# EAGLE board Micro_SD_Block_GiantPanel_v20 (EAGLE 6.6.0), part 1 of 11
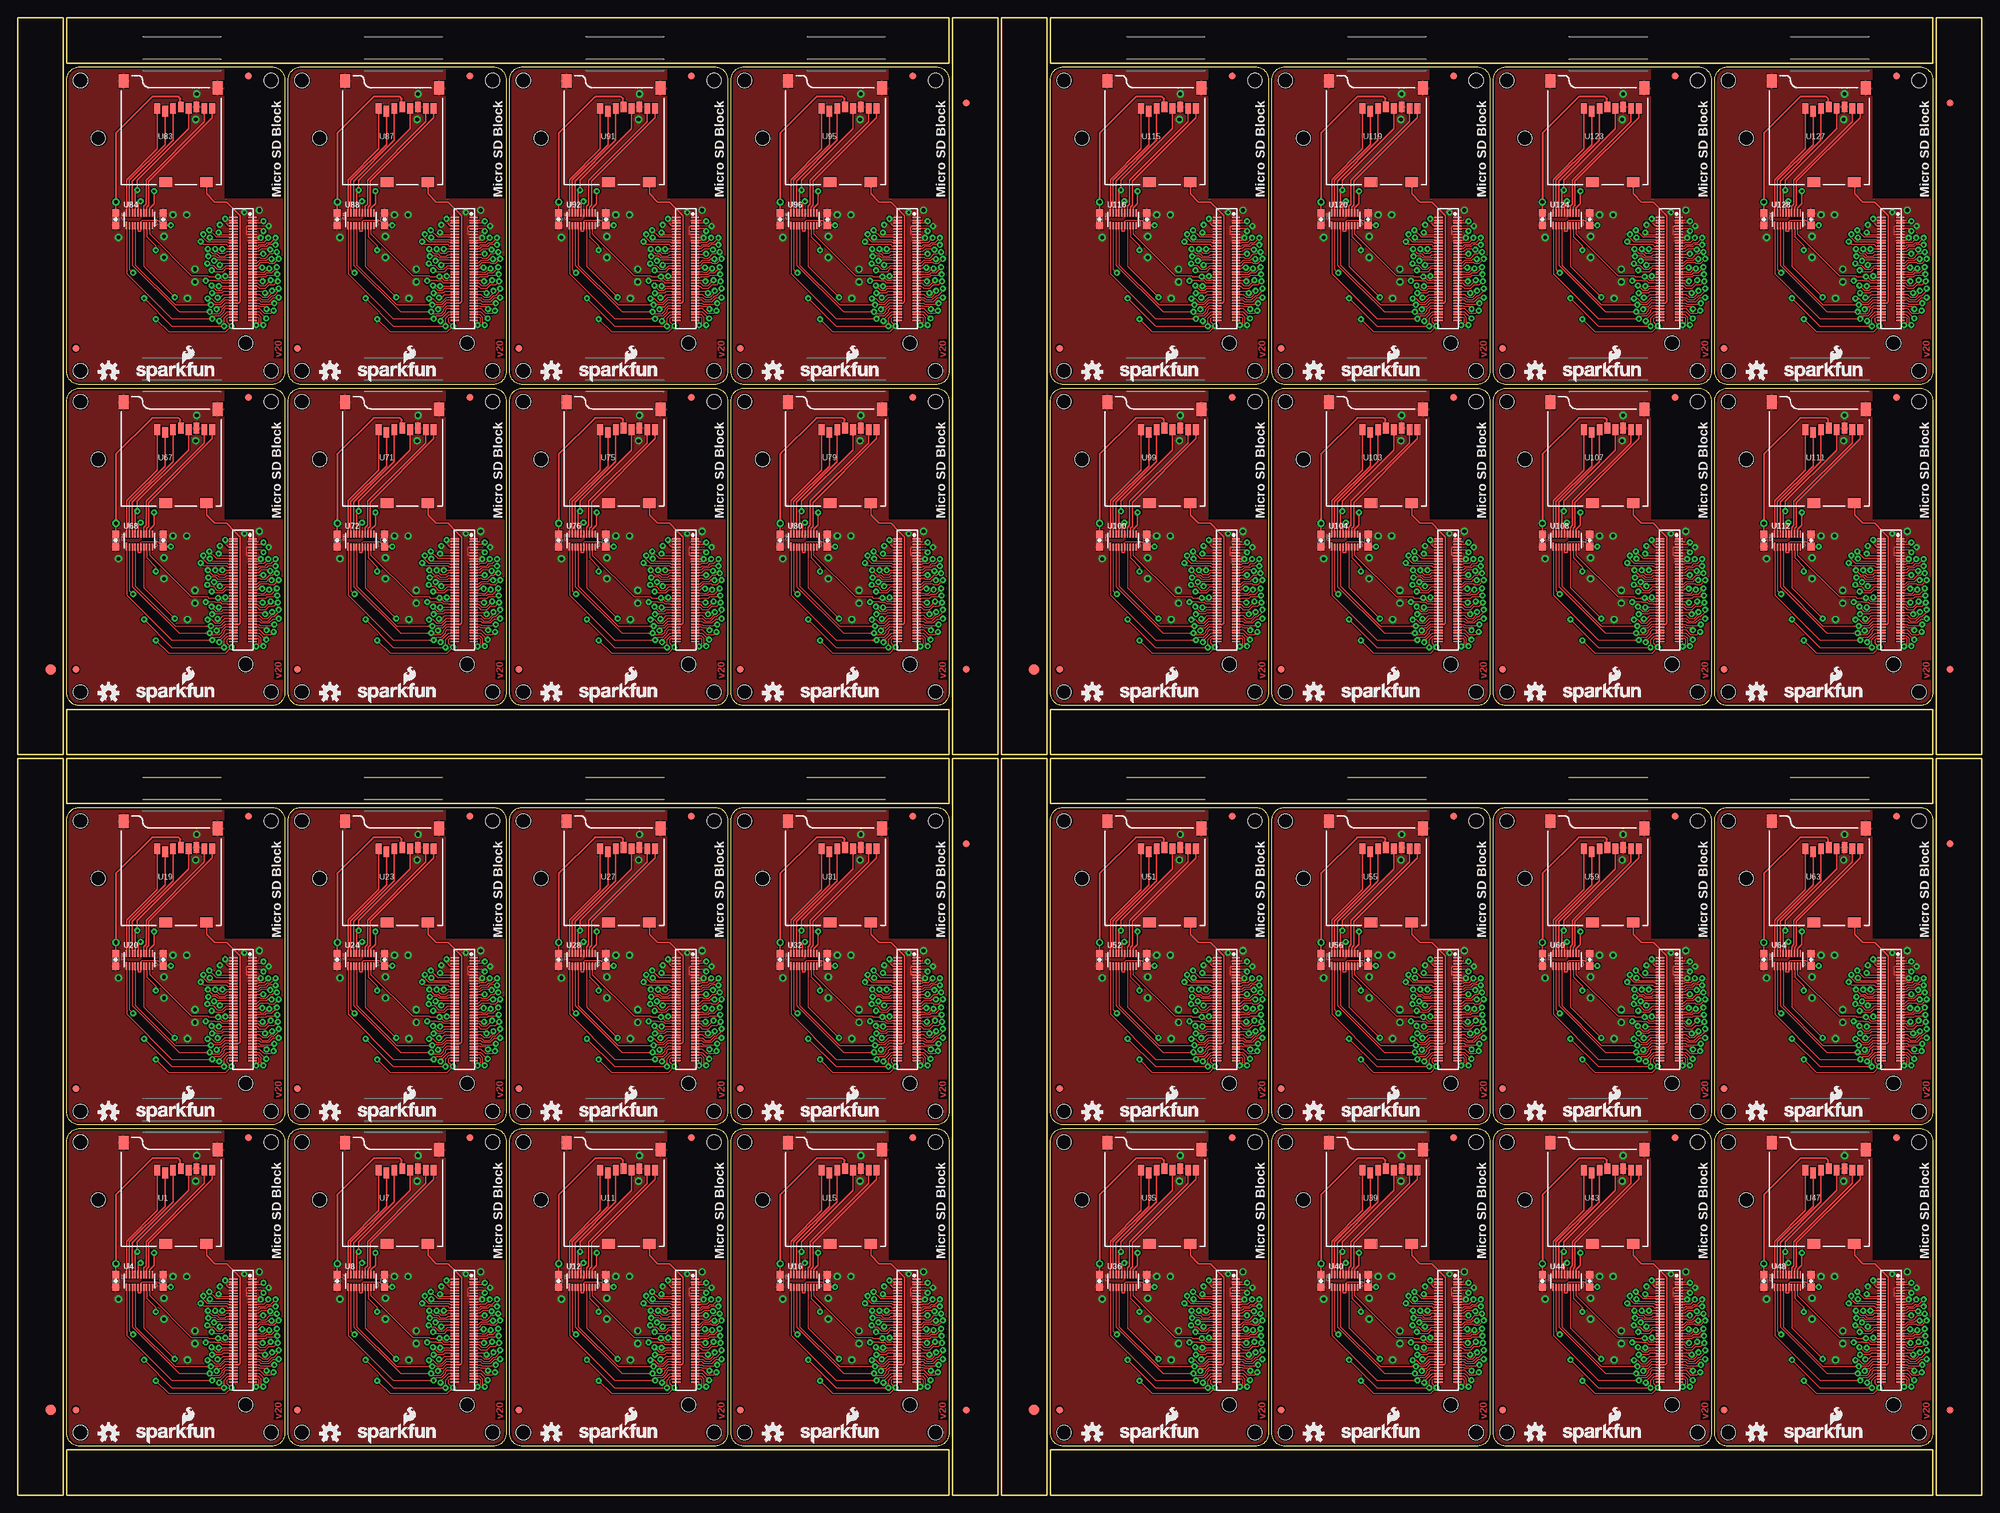
[diagram p0: board, top side]
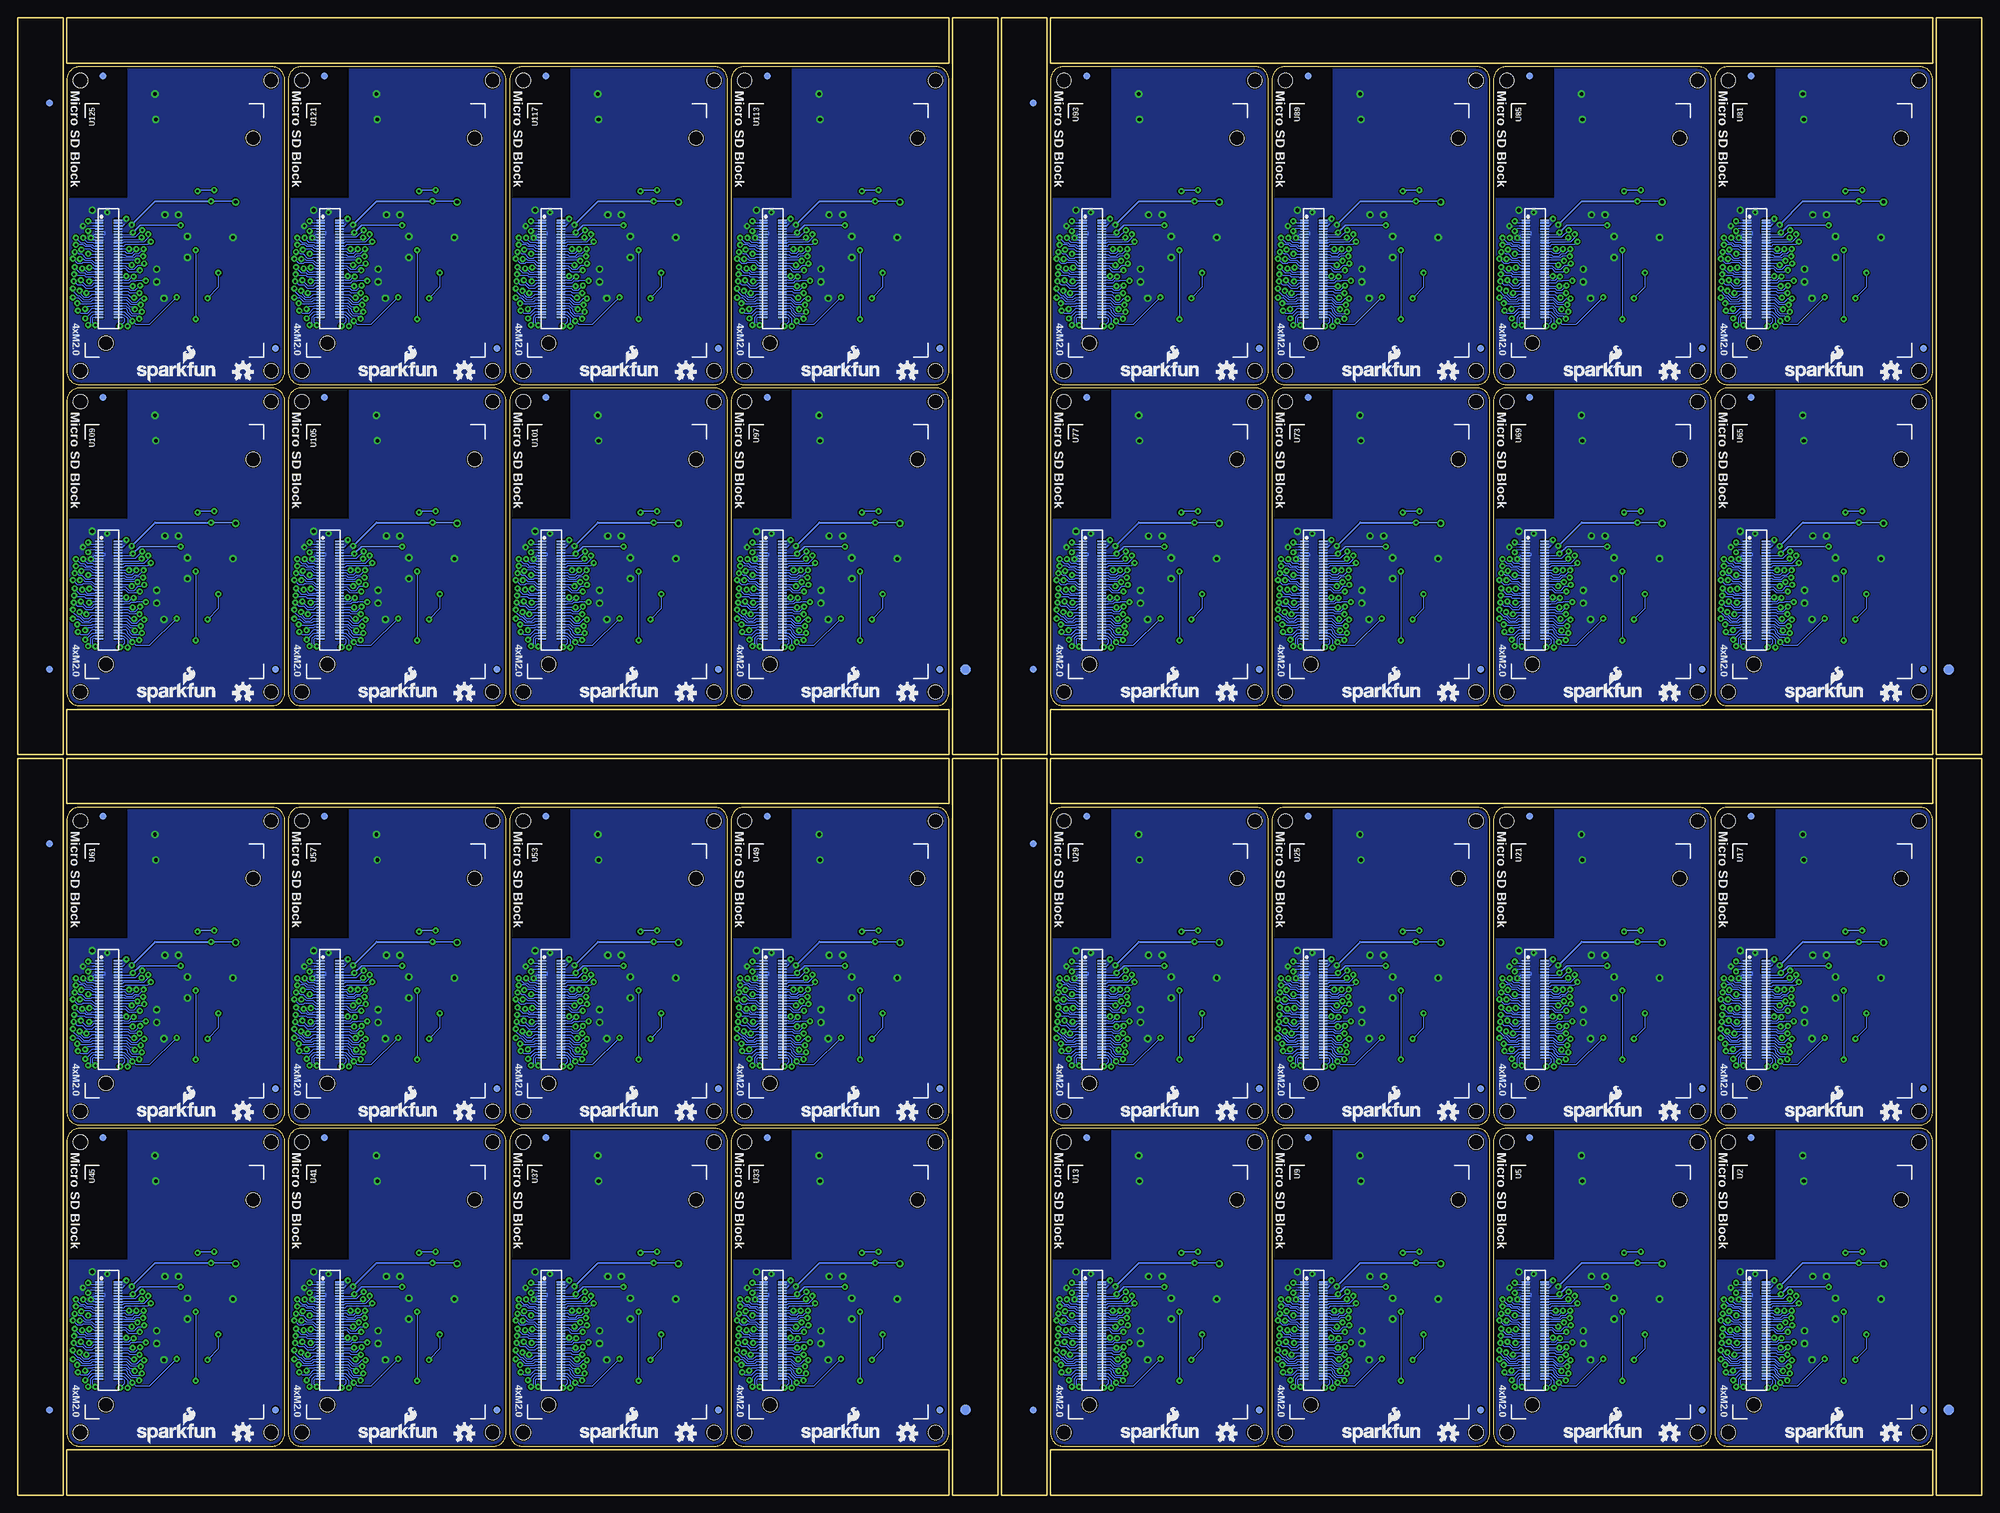
[diagram p1: board, bottom side, seen from below]

Size 274.83 x 206.76 mm. Coordinates in mm from the lower left corner, seen from the top.
Outline: 336 segments
Copper layers (1*16): Top 0.035mm / dielectric 1.5mm / Bottom 0.035mm
Design rules "SparkFun-2-layer *": minimum track width 6mil, minimum drill 13mil, track to track 6mil, track to pad 6mil, pad to pad 6mil, via to via 6mil, smd to smd 6mil, copper to edge 8mil, drill to drill 8mil, minimum pad ring 12mil, minimum via ring 10mil, stop-mask expansion 4mil, vias tented up to drill 20mil, thermal gap 6mil
Holes 2 mm at 35.43,8.76 8.76,8.76 8.76,49.4 35.43,49.4 66.42,8.76 39.75,8.76 39.75,49.4 66.42,49.4 97.41,8.76 70.74,8.76 70.74,49.4 97.41,49.4 128.4,8.76 101.73,8.76 101.73,49.4 128.4,49.4 35.43,53.72 8.76,53.72 8.76,94.36 35.43,94.36 66.42,53.72 39.75,53.72 39.75,94.36 66.42,94.36 97.41,53.72 70.74,53.72 70.74,94.36 97.41,94.36 128.4,53.72 101.73,53.72 101.73,94.36 128.4,94.36 173.1,8.76 146.43,8.76 146.43,49.4 173.1,49.4 204.09,8.76 177.42,8.76 177.42,49.4 204.09,49.4 235.08,8.76 208.41,8.76 208.41,49.4 235.08,49.4 266.06,8.76 239.4,8.76 239.4,49.4 266.06,49.4 173.1,53.72 146.43,53.72 146.43,94.36 173.1,94.36 204.09,53.72 177.42,53.72 177.42,94.36 204.09,94.36 235.08,53.72 208.41,53.72 208.41,94.36 235.08,94.36 266.06,53.72 239.4,53.72 239.4,94.36 266.06,94.36 35.43,112.39 8.76,112.39 8.76,153.03 35.43,153.03 66.42,112.39 39.75,112.39 39.75,153.03 66.42,153.03 97.41,112.39 70.74,112.39 70.74,153.03 97.41,153.03 128.4,112.39 101.73,112.39 101.73,153.03 128.4,153.03 35.43,157.35 8.76,157.35 8.76,197.99 35.43,197.99 66.42,157.35 39.75,157.35 39.75,197.99 66.42,197.99 97.41,157.35 70.74,157.35 70.74,197.99 97.41,197.99 128.4,157.35 101.73,157.35 101.73,197.99 128.4,197.99 173.1,112.39 146.43,112.39 146.43,153.03 173.1,153.03 204.09,112.39 177.42,112.39 177.42,153.03 204.09,153.03 235.08,112.39 208.41,112.39 208.41,153.03 235.08,153.03 266.06,112.39 239.4,112.39 239.4,153.03 266.06,153.03 173.1,157.35 146.43,157.35 146.43,197.99 173.1,197.99 204.09,157.35 177.42,157.35 177.42,197.99 204.09,197.99 235.08,157.35 208.41,157.35 208.41,197.99 235.08,197.99 266.06,157.35 239.4,157.35 239.4,197.99 266.06,197.99
tRestrict: area 29,33 to 37.3,51.3; area 59.9,33 to 68.3,51.3; area 90.9,33 to 99.3,51.3; area 121.9,33 to 130.3,51.3; area 29,78 to 37.3,96.3; area 59.9,78 to 68.3,96.3; area 90.9,78 to 99.3,96.3; area 121.9,78 to 130.3,96.3; area 166.6,33 to 175,51.3; area 197.6,33 to 206,51.3; area 228.6,33 to 237,51.3; area 259.6,33 to 268,51.3; 20 more areas
bRestrict: area 29,33 to 37.3,51.3; area 59.9,33 to 68.3,51.3; area 90.9,33 to 99.3,51.3; area 121.9,33 to 130.3,51.3; area 29,78 to 37.3,96.3; area 59.9,78 to 68.3,96.3; area 90.9,78 to 99.3,96.3; area 121.9,78 to 130.3,96.3; area 166.6,33 to 175,51.3; area 197.6,33 to 206,51.3; area 228.6,33 to 237,51.3; area 259.6,33 to 268,51.3; 20 more areas; 32 lines

## Footprints (pad centres in the part's own frame; a part is rotated, then mirrored left to right if it is on the bottom)
0603-CAP = smd 1.1 x 1: 1 -0.85,0; 2 0.85,0
FIDUCIAL-1.5X3 = smd 1.5 x 1.5: 1 0,0
FIDUCIAL-1X2 = smd 1 x 1: 1 0,0
MICRO-SD-SOCKET-PP = smd 0.8 x 1.5: 1 -8.94,10.7; 2 -7.84,10.3; 3 -6.74,10.7; 4 -5.64,10.9; 5 -4.54,10.7; 6 -3.44,10.9; 7 -2.34,10.7; 8 -1.24,10.7 | smd 1.8 x 1.4: CD1 -2.05,0.4; CD2 -7.75,0.4 | smd 1.4 x 1.9: GND1 -13.6,14.55; GND3 -0.45,13.55
EDISON_DAUGHTER = smd 1.14 x 0.2: 1 1.98,19.17; 2 4.62,19.17; 3 1.98,18.77; 4 4.62,18.77; 5 1.98,18.37; 6 4.62,18.37; 7 1.98,17.97; 8 4.62,17.97; 9 1.98,17.57; 10 4.62,17.57; 11 1.98,17.17; 12 4.62,17.17; 13 1.98,16.77; 14 4.62,16.77; 15 1.98,16.37; 16 4.62,16.37; 17 1.98,15.97; 18 4.62,15.97; 19 1.98,15.57; 20 4.62,15.57; 21 1.98,15.17; 22 4.62,15.17; 23 1.98,14.77; 24 4.62,14.77; 25 1.98,14.37; 26 4.62,14.37; 27 1.98,13.97; 28 4.62,13.97; 29 1.98,13.57; 30 4.62,13.57; 31 1.98,13.17; 32 4.62,13.17; 33 1.98,12.77; 34 4.62,12.77; 35 1.98,12.37; 36 4.62,12.37; 37 1.98,11.97; 38 4.62,11.97; 39 1.98,11.57; 40 4.62,11.57; 41 1.98,11.17; 42 4.62,11.17; 43 1.98,10.77; 44 4.62,10.77; 45 1.98,10.37; 46 4.62,10.37; 47 1.98,9.97; 48 4.62,9.97; 49 1.98,9.57; 50 4.62,9.57; 51 1.98,9.17; 52 4.62,9.17; 53 1.98,8.77; 54 4.62,8.77; 55 1.98,8.37; 56 4.62,8.37; 57 1.98,7.97; 58 4.62,7.97; 59 1.98,7.57; 60 4.62,7.57; 61 1.98,7.17; 62 4.62,7.17; 63 1.98,6.77; 64 4.62,6.77; 65 1.98,6.37; 66 4.62,6.37; 67 1.98,5.97; 68 4.62,5.97; 69 1.98,5.57; 70 4.62,5.57 | hole 2: 23.53,30.67; 2.93,1.98
DF40C-70DP-0.4(51) = smd 0.2 x 1.14 bottom: 1 6.8,1.32; 2 6.8,-1.32; 3 6.4,1.32; 4 6.4,-1.32; 5 6,1.32; 6 6,-1.32; 7 5.6,1.32; 8 5.6,-1.32; 9 5.2,1.32; 10 5.2,-1.32; 11 4.8,1.32; 12 4.8,-1.32; 13 4.4,1.32; 14 4.4,-1.32; 15 4,1.32; 16 4,-1.32; 17 3.6,1.32; 18 3.6,-1.32; 19 3.2,1.32; 20 3.2,-1.32; 21 2.8,1.32; 22 2.8,-1.32; 23 2.4,1.32; 24 2.4,-1.32; 25 2,1.32; 26 2,-1.32; 27 1.6,1.32; 28 1.6,-1.32; 29 1.2,1.32; 30 1.2,-1.32; 31 0.8,1.32; 32 0.8,-1.32; 33 0.4,1.32; 34 0.4,-1.32; 35 0,1.32; 36 0,-1.32; 37 -0.4,1.32; 38 -0.4,-1.32; 39 -0.8,1.32; 40 -0.8,-1.32; 41 -1.2,1.32; 42 -1.2,-1.32; 43 -1.6,1.32; 44 -1.6,-1.32; 45 -2,1.32; 46 -2,-1.32; 47 -2.4,1.32; 48 -2.4,-1.32; 49 -2.8,1.32; 50 -2.8,-1.32; 51 -3.2,1.32; 52 -3.2,-1.32; 53 -3.6,1.32; 54 -3.6,-1.32; 55 -4,1.32; 56 -4,-1.32; 57 -4.4,1.32; 58 -4.4,-1.32; 59 -4.8,1.32; 60 -4.8,-1.32; 61 -5.2,1.32; 62 -5.2,-1.32; 63 -5.6,1.32; 64 -5.6,-1.32; 65 -6,1.32; 66 -6,-1.32; 67 -6.4,1.32; 68 -6.4,-1.32; 69 -6.8,1.32; 70 -6.8,-1.32; NC1 7.2,1.32; NC2 7.2,-1.32; NC3 -7.2,-1.32; NC4 -7.2,1.32
UFDFN-20 = smd 0.2 x 1.1: P$1 -1.8,-0.85 | smd 0.2 x 1: P$2 -1.4,-0.9; P$3 -1,-0.9; P$4 -0.6,-0.9; P$5 -0.2,-0.9; P$6 0.2,-0.9; P$7 0.6,-0.9; P$8 1,-0.9; P$9 1.4,-0.9; P$10 1.8,-0.9; P$11 1.8,0.9; P$12 1.4,0.9; P$13 1,0.9; P$14 0.6,0.9; P$15 0.2,0.9; P$16 -0.2,0.9; P$17 -0.6,0.9; P$18 -1,0.9; P$19 -1.4,0.9; P$20 -1.8,0.9

## Placement (x,y rotation side)
C1  0.1uF  [0603-CAP]  20.32,29.97 90 top
C2  0.1uF  [0603-CAP]  13.72,29.97 270 top
C3  0.1uF  [0603-CAP]  51.31,29.97 90 top
C4  0.1uF  [0603-CAP]  44.7,29.97 270 top
C5  0.1uF  [0603-CAP]  82.3,29.97 90 top
C6  0.1uF  [0603-CAP]  75.69,29.97 270 top
C7  0.1uF  [0603-CAP]  113.28,29.97 90 top
C8  0.1uF  [0603-CAP]  106.68,29.97 270 top
C9  0.1uF  [0603-CAP]  20.32,74.93 90 top
C10  0.1uF  [0603-CAP]  13.72,74.93 270 top
C11  0.1uF  [0603-CAP]  51.31,74.93 90 top
C12  0.1uF  [0603-CAP]  44.7,74.93 270 top
C13  0.1uF  [0603-CAP]  82.3,74.93 90 top
C14  0.1uF  [0603-CAP]  75.69,74.93 270 top
C15  0.1uF  [0603-CAP]  113.28,74.93 90 top
C16  0.1uF  [0603-CAP]  106.68,74.93 270 top
C17  0.1uF  [0603-CAP]  157.99,29.97 90 top
C18  0.1uF  [0603-CAP]  151.38,29.97 270 top
C19  0.1uF  [0603-CAP]  188.98,29.97 90 top
C20  0.1uF  [0603-CAP]  182.37,29.97 270 top
C21  0.1uF  [0603-CAP]  219.96,29.97 90 top
C22  0.1uF  [0603-CAP]  213.36,29.97 270 top
C23  0.1uF  [0603-CAP]  250.95,29.97 90 top
C24  0.1uF  [0603-CAP]  244.35,29.97 270 top
C25  0.1uF  [0603-CAP]  157.99,74.93 90 top
C26  0.1uF  [0603-CAP]  151.38,74.93 270 top
C27  0.1uF  [0603-CAP]  188.98,74.93 90 top
C28  0.1uF  [0603-CAP]  182.37,74.93 270 top
C29  0.1uF  [0603-CAP]  219.96,74.93 90 top
C30  0.1uF  [0603-CAP]  213.36,74.93 270 top
C31  0.1uF  [0603-CAP]  250.95,74.93 90 top
C32  0.1uF  [0603-CAP]  244.35,74.93 270 top
C33  0.1uF  [0603-CAP]  20.32,133.6 90 top
C34  0.1uF  [0603-CAP]  13.72,133.6 270 top
C35  0.1uF  [0603-CAP]  51.31,133.6 90 top
C36  0.1uF  [0603-CAP]  44.7,133.6 270 top
C37  0.1uF  [0603-CAP]  82.3,133.6 90 top
C38  0.1uF  [0603-CAP]  75.69,133.6 270 top
C39  0.1uF  [0603-CAP]  113.28,133.6 90 top
C40  0.1uF  [0603-CAP]  106.68,133.6 270 top
C41  0.1uF  [0603-CAP]  20.32,178.56 90 top
C42  0.1uF  [0603-CAP]  13.72,178.56 270 top
C43  0.1uF  [0603-CAP]  51.31,178.56 90 top
C44  0.1uF  [0603-CAP]  44.7,178.56 270 top
C45  0.1uF  [0603-CAP]  82.3,178.56 90 top
C46  0.1uF  [0603-CAP]  75.69,178.56 270 top
C47  0.1uF  [0603-CAP]  113.28,178.56 90 top
C48  0.1uF  [0603-CAP]  106.68,178.56 270 top
C49  0.1uF  [0603-CAP]  157.99,133.6 90 top
C50  0.1uF  [0603-CAP]  151.38,133.6 270 top
C51  0.1uF  [0603-CAP]  188.98,133.6 90 top
C52  0.1uF  [0603-CAP]  182.37,133.6 270 top
C53  0.1uF  [0603-CAP]  219.96,133.6 90 top
C54  0.1uF  [0603-CAP]  213.36,133.6 270 top
C55  0.1uF  [0603-CAP]  250.95,133.6 90 top
C56  0.1uF  [0603-CAP]  244.35,133.6 270 top
C57  0.1uF  [0603-CAP]  157.99,178.56 90 top
C58  0.1uF  [0603-CAP]  151.38,178.56 270 top
C59  0.1uF  [0603-CAP]  188.98,178.56 90 top
C60  0.1uF  [0603-CAP]  182.37,178.56 270 top
C61  0.1uF  [0603-CAP]  219.96,178.56 90 top
C62  0.1uF  [0603-CAP]  213.36,178.56 270 top
C63  0.1uF  [0603-CAP]  250.95,178.56 90 top
C64  0.1uF  [0603-CAP]  244.35,178.56 270 top
E$1  [FIDUCIAL-1.5X3]  4.57,11.94 0 top
E$2  [FIDUCIAL-1.5X3]  4.57,11.94 0 bottom
E$3  [FIDUCIAL-1X2]  132.72,91.19 180 bottom
E$4  [FIDUCIAL-1X2]  132.72,11.94 0 top
E$5  [FIDUCIAL-1X2]  132.72,91.19 180 top
E$6  [FIDUCIAL-1X2]  132.72,11.94 0 bottom
E$7  [FIDUCIAL-1X2]  270.38,11.94 0 top
E$8  [FIDUCIAL-1X2]  270.38,91.19 180 top
E$9  [FIDUCIAL-1.5X3]  142.24,11.94 0 top
E$10  [FIDUCIAL-1.5X3]  142.24,11.94 0 bottom
E$11  [FIDUCIAL-1X2]  270.38,91.19 180 bottom
E$12  [FIDUCIAL-1X2]  270.38,11.94 0 bottom
E$13  [FIDUCIAL-1X2]  132.72,115.57 0 top
E$14  [FIDUCIAL-1X2]  132.72,194.82 180 top
E$15  [FIDUCIAL-1.5X3]  4.57,115.57 0 top
E$16  [FIDUCIAL-1.5X3]  4.57,115.57 0 bottom
E$17  [FIDUCIAL-1X2]  132.72,194.82 180 bottom
E$18  [FIDUCIAL-1X2]  132.72,115.57 0 bottom
E$19  [FIDUCIAL-1X2]  270.38,115.57 0 top
E$20  [FIDUCIAL-1X2]  270.38,194.82 180 top
E$21  [FIDUCIAL-1.5X3]  142.24,115.57 0 top
E$22  [FIDUCIAL-1.5X3]  142.24,115.57 0 bottom
E$23  [FIDUCIAL-1X2]  270.38,194.82 180 bottom
E$24  [FIDUCIAL-1X2]  270.38,115.57 0 bottom
FID1  FIDUCIAL1X2  [FIDUCIAL-1X2]  8.13,11.94 0 top
FID2  FIDUCIAL1X2  [FIDUCIAL-1X2]  32.26,50.04 0 top
FID3  FIDUCIAL1X2  [FIDUCIAL-1X2]  8.13,11.94 0 bottom
FID4  FIDUCIAL1X2  [FIDUCIAL-1X2]  32.26,50.04 0 bottom
FID5  FIDUCIAL1X2  [FIDUCIAL-1X2]  39.12,11.94 0 top
FID6  FIDUCIAL1X2  [FIDUCIAL-1X2]  63.25,50.04 0 top
FID7  FIDUCIAL1X2  [FIDUCIAL-1X2]  39.12,11.94 0 bottom
FID8  FIDUCIAL1X2  [FIDUCIAL-1X2]  63.25,50.04 0 bottom
FID9  FIDUCIAL1X2  [FIDUCIAL-1X2]  70.1,11.94 0 top
FID10  FIDUCIAL1X2  [FIDUCIAL-1X2]  94.23,50.04 0 top
FID11  FIDUCIAL1X2  [FIDUCIAL-1X2]  70.1,11.94 0 bottom
FID12  FIDUCIAL1X2  [FIDUCIAL-1X2]  94.23,50.04 0 bottom
FID13  FIDUCIAL1X2  [FIDUCIAL-1X2]  101.09,11.94 0 top
FID14  FIDUCIAL1X2  [FIDUCIAL-1X2]  125.22,50.04 0 top
FID15  FIDUCIAL1X2  [FIDUCIAL-1X2]  101.09,11.94 0 bottom
FID16  FIDUCIAL1X2  [FIDUCIAL-1X2]  125.22,50.04 0 bottom
FID17  FIDUCIAL1X2  [FIDUCIAL-1X2]  8.13,56.9 0 top
FID18  FIDUCIAL1X2  [FIDUCIAL-1X2]  32.26,95 0 top
FID19  FIDUCIAL1X2  [FIDUCIAL-1X2]  8.13,56.9 0 bottom
FID20  FIDUCIAL1X2  [FIDUCIAL-1X2]  32.26,95 0 bottom
FID21  FIDUCIAL1X2  [FIDUCIAL-1X2]  39.12,56.9 0 top
FID22  FIDUCIAL1X2  [FIDUCIAL-1X2]  63.25,95 0 top
FID23  FIDUCIAL1X2  [FIDUCIAL-1X2]  39.12,56.9 0 bottom
FID24  FIDUCIAL1X2  [FIDUCIAL-1X2]  63.25,95 0 bottom
FID25  FIDUCIAL1X2  [FIDUCIAL-1X2]  70.1,56.9 0 top
FID26  FIDUCIAL1X2  [FIDUCIAL-1X2]  94.23,95 0 top
FID27  FIDUCIAL1X2  [FIDUCIAL-1X2]  70.1,56.9 0 bottom
FID28  FIDUCIAL1X2  [FIDUCIAL-1X2]  94.23,95 0 bottom
FID29  FIDUCIAL1X2  [FIDUCIAL-1X2]  101.09,56.9 0 top
FID30  FIDUCIAL1X2  [FIDUCIAL-1X2]  125.22,95 0 top
FID31  FIDUCIAL1X2  [FIDUCIAL-1X2]  101.09,56.9 0 bottom
FID32  FIDUCIAL1X2  [FIDUCIAL-1X2]  125.22,95 0 bottom
FID33  FIDUCIAL1X2  [FIDUCIAL-1X2]  145.8,11.94 0 top
FID34  FIDUCIAL1X2  [FIDUCIAL-1X2]  169.93,50.04 0 top
FID35  FIDUCIAL1X2  [FIDUCIAL-1X2]  145.8,11.94 0 bottom
FID36  FIDUCIAL1X2  [FIDUCIAL-1X2]  169.93,50.04 0 bottom
FID37  FIDUCIAL1X2  [FIDUCIAL-1X2]  176.78,11.94 0 top
FID38  FIDUCIAL1X2  [FIDUCIAL-1X2]  200.91,50.04 0 top
FID39  FIDUCIAL1X2  [FIDUCIAL-1X2]  176.78,11.94 0 bottom
FID40  FIDUCIAL1X2  [FIDUCIAL-1X2]  200.91,50.04 0 bottom
FID41  FIDUCIAL1X2  [FIDUCIAL-1X2]  207.77,11.94 0 top
FID42  FIDUCIAL1X2  [FIDUCIAL-1X2]  231.9,50.04 0 top
FID43  FIDUCIAL1X2  [FIDUCIAL-1X2]  207.77,11.94 0 bottom
FID44  FIDUCIAL1X2  [FIDUCIAL-1X2]  231.9,50.04 0 bottom
FID45  FIDUCIAL1X2  [FIDUCIAL-1X2]  238.76,11.94 0 top
FID46  FIDUCIAL1X2  [FIDUCIAL-1X2]  262.89,50.04 0 top
FID47  FIDUCIAL1X2  [FIDUCIAL-1X2]  238.76,11.94 0 bottom
FID48  FIDUCIAL1X2  [FIDUCIAL-1X2]  262.89,50.04 0 bottom
FID49  FIDUCIAL1X2  [FIDUCIAL-1X2]  145.8,56.9 0 top
FID50  FIDUCIAL1X2  [FIDUCIAL-1X2]  169.93,95 0 top
FID51  FIDUCIAL1X2  [FIDUCIAL-1X2]  145.8,56.9 0 bottom
FID52  FIDUCIAL1X2  [FIDUCIAL-1X2]  169.93,95 0 bottom
FID53  FIDUCIAL1X2  [FIDUCIAL-1X2]  176.78,56.9 0 top
FID54  FIDUCIAL1X2  [FIDUCIAL-1X2]  200.91,95 0 top
FID55  FIDUCIAL1X2  [FIDUCIAL-1X2]  176.78,56.9 0 bottom
FID56  FIDUCIAL1X2  [FIDUCIAL-1X2]  200.91,95 0 bottom
FID57  FIDUCIAL1X2  [FIDUCIAL-1X2]  207.77,56.9 0 top
FID58  FIDUCIAL1X2  [FIDUCIAL-1X2]  231.9,95 0 top
FID59  FIDUCIAL1X2  [FIDUCIAL-1X2]  207.77,56.9 0 bottom
FID60  FIDUCIAL1X2  [FIDUCIAL-1X2]  231.9,95 0 bottom
FID61  FIDUCIAL1X2  [FIDUCIAL-1X2]  238.76,56.9 0 top
FID62  FIDUCIAL1X2  [FIDUCIAL-1X2]  262.89,95 0 top
FID63  FIDUCIAL1X2  [FIDUCIAL-1X2]  238.76,56.9 0 bottom
FID64  FIDUCIAL1X2  [FIDUCIAL-1X2]  262.89,95 0 bottom
FID65  FIDUCIAL1X2  [FIDUCIAL-1X2]  8.13,115.57 0 top
FID66  FIDUCIAL1X2  [FIDUCIAL-1X2]  32.26,153.67 0 top
FID67  FIDUCIAL1X2  [FIDUCIAL-1X2]  8.13,115.57 0 bottom
FID68  FIDUCIAL1X2  [FIDUCIAL-1X2]  32.26,153.67 0 bottom
FID69  FIDUCIAL1X2  [FIDUCIAL-1X2]  39.12,115.57 0 top
FID70  FIDUCIAL1X2  [FIDUCIAL-1X2]  63.25,153.67 0 top
FID71  FIDUCIAL1X2  [FIDUCIAL-1X2]  39.12,115.57 0 bottom
FID72  FIDUCIAL1X2  [FIDUCIAL-1X2]  63.25,153.67 0 bottom
FID73  FIDUCIAL1X2  [FIDUCIAL-1X2]  70.1,115.57 0 top
FID74  FIDUCIAL1X2  [FIDUCIAL-1X2]  94.23,153.67 0 top
FID75  FIDUCIAL1X2  [FIDUCIAL-1X2]  70.1,115.57 0 bottom
FID76  FIDUCIAL1X2  [FIDUCIAL-1X2]  94.23,153.67 0 bottom
FID77  FIDUCIAL1X2  [FIDUCIAL-1X2]  101.09,115.57 0 top
FID78  FIDUCIAL1X2  [FIDUCIAL-1X2]  125.22,153.67 0 top
FID79  FIDUCIAL1X2  [FIDUCIAL-1X2]  101.09,115.57 0 bottom
FID80  FIDUCIAL1X2  [FIDUCIAL-1X2]  125.22,153.67 0 bottom
FID81  FIDUCIAL1X2  [FIDUCIAL-1X2]  8.13,160.53 0 top
FID82  FIDUCIAL1X2  [FIDUCIAL-1X2]  32.26,198.63 0 top
FID83  FIDUCIAL1X2  [FIDUCIAL-1X2]  8.13,160.53 0 bottom
FID84  FIDUCIAL1X2  [FIDUCIAL-1X2]  32.26,198.63 0 bottom
FID85  FIDUCIAL1X2  [FIDUCIAL-1X2]  39.12,160.53 0 top
FID86  FIDUCIAL1X2  [FIDUCIAL-1X2]  63.25,198.63 0 top
FID87  FIDUCIAL1X2  [FIDUCIAL-1X2]  39.12,160.53 0 bottom
FID88  FIDUCIAL1X2  [FIDUCIAL-1X2]  63.25,198.63 0 bottom
FID89  FIDUCIAL1X2  [FIDUCIAL-1X2]  70.1,160.53 0 top
FID90  FIDUCIAL1X2  [FIDUCIAL-1X2]  94.23,198.63 0 top
FID91  FIDUCIAL1X2  [FIDUCIAL-1X2]  70.1,160.53 0 bottom
FID92  FIDUCIAL1X2  [FIDUCIAL-1X2]  94.23,198.63 0 bottom
FID93  FIDUCIAL1X2  [FIDUCIAL-1X2]  101.09,160.53 0 top
FID94  FIDUCIAL1X2  [FIDUCIAL-1X2]  125.22,198.63 0 top
FID95  FIDUCIAL1X2  [FIDUCIAL-1X2]  101.09,160.53 0 bottom
FID96  FIDUCIAL1X2  [FIDUCIAL-1X2]  125.22,198.63 0 bottom
FID97  FIDUCIAL1X2  [FIDUCIAL-1X2]  145.8,115.57 0 top
FID98  FIDUCIAL1X2  [FIDUCIAL-1X2]  169.93,153.67 0 top
FID99  FIDUCIAL1X2  [FIDUCIAL-1X2]  145.8,115.57 0 bottom
FID100  FIDUCIAL1X2  [FIDUCIAL-1X2]  169.93,153.67 0 bottom
FID101  FIDUCIAL1X2  [FIDUCIAL-1X2]  176.78,115.57 0 top
FID102  FIDUCIAL1X2  [FIDUCIAL-1X2]  200.91,153.67 0 top
FID103  FIDUCIAL1X2  [FIDUCIAL-1X2]  176.78,115.57 0 bottom
FID104  FIDUCIAL1X2  [FIDUCIAL-1X2]  200.91,153.67 0 bottom
FID105  FIDUCIAL1X2  [FIDUCIAL-1X2]  207.77,115.57 0 top
FID106  FIDUCIAL1X2  [FIDUCIAL-1X2]  231.9,153.67 0 top
FID107  FIDUCIAL1X2  [FIDUCIAL-1X2]  207.77,115.57 0 bottom
FID108  FIDUCIAL1X2  [FIDUCIAL-1X2]  231.9,153.67 0 bottom
FID109  FIDUCIAL1X2  [FIDUCIAL-1X2]  238.76,115.57 0 top
FID110  FIDUCIAL1X2  [FIDUCIAL-1X2]  262.89,153.67 0 top
FID111  FIDUCIAL1X2  [FIDUCIAL-1X2]  238.76,115.57 0 bottom
FID112  FIDUCIAL1X2  [FIDUCIAL-1X2]  262.89,153.67 0 bottom
FID113  FIDUCIAL1X2  [FIDUCIAL-1X2]  145.8,160.53 0 top
FID114  FIDUCIAL1X2  [FIDUCIAL-1X2]  169.93,198.63 0 top
FID115  FIDUCIAL1X2  [FIDUCIAL-1X2]  145.8,160.53 0 bottom
FID116  FIDUCIAL1X2  [FIDUCIAL-1X2]  169.93,198.63 0 bottom
FID117  FIDUCIAL1X2  [FIDUCIAL-1X2]  176.78,160.53 0 top
FID118  FIDUCIAL1X2  [FIDUCIAL-1X2]  200.91,198.63 0 top
FID119  FIDUCIAL1X2  [FIDUCIAL-1X2]  176.78,160.53 0 bottom
FID120  FIDUCIAL1X2  [FIDUCIAL-1X2]  200.91,198.63 0 bottom
FID121  FIDUCIAL1X2  [FIDUCIAL-1X2]  207.77,160.53 0 top
FID122  FIDUCIAL1X2  [FIDUCIAL-1X2]  231.9,198.63 0 top
FID123  FIDUCIAL1X2  [FIDUCIAL-1X2]  207.77,160.53 0 bottom
FID124  FIDUCIAL1X2  [FIDUCIAL-1X2]  231.9,198.63 0 bottom
FID125  FIDUCIAL1X2  [FIDUCIAL-1X2]  238.76,160.53 0 top
FID126  FIDUCIAL1X2  [FIDUCIAL-1X2]  262.89,198.63 0 top
FID127  FIDUCIAL1X2  [FIDUCIAL-1X2]  238.76,160.53 0 bottom
FID128  FIDUCIAL1X2  [FIDUCIAL-1X2]  262.89,198.63 0 bottom
LOGO1  OSHW-LOGOS  [OSHW-LOGO-S]  12.7,8.64 0 top
LOGO2  OSHW-LOGOS  [OSHW-LOGO-S]  12.7,8.64 0 bottom
LOGO3  SFE_LOGO_NAME_FLAME.1_INCH  [SFE_LOGO_NAME_FLAME_.1]  27.94,7.11 0 bottom
LOGO4  SFE_LOGO_NAME_FLAME.1_INCH  [SFE_LOGO_NAME_FLAME_.1]  16.15,7.11 0 top
LOGO5  OSHW-LOGOS  [OSHW-LOGO-S]  43.69,8.64 0 bottom
LOGO6  SFE_LOGO_NAME_FLAME.1_INCH  [SFE_LOGO_NAME_FLAME_.1]  58.93,7.11 0 bottom
LOGO7  OSHW-LOGOS  [OSHW-LOGO-S]  43.69,8.64 0 top
LOGO8  SFE_LOGO_NAME_FLAME.1_INCH  [SFE_LOGO_NAME_FLAME_.1]  47.14,7.11 0 top
LOGO9  OSHW-LOGOS  [OSHW-LOGO-S]  74.68,8.64 0 bottom
LOGO10  SFE_LOGO_NAME_FLAME.1_INCH  [SFE_LOGO_NAME_FLAME_.1]  89.92,7.11 0 bottom
LOGO11  OSHW-LOGOS  [OSHW-LOGO-S]  74.68,8.64 0 top
LOGO12  SFE_LOGO_NAME_FLAME.1_INCH  [SFE_LOGO_NAME_FLAME_.1]  78.13,7.11 0 top
LOGO13  OSHW-LOGOS  [OSHW-LOGO-S]  105.66,8.64 0 bottom
LOGO14  SFE_LOGO_NAME_FLAME.1_INCH  [SFE_LOGO_NAME_FLAME_.1]  120.9,7.11 0 bottom
LOGO15  OSHW-LOGOS  [OSHW-LOGO-S]  105.66,8.64 0 top
LOGO16  SFE_LOGO_NAME_FLAME.1_INCH  [SFE_LOGO_NAME_FLAME_.1]  109.12,7.11 0 top
LOGO17  OSHW-LOGOS  [OSHW-LOGO-S]  12.7,53.59 0 bottom
LOGO18  SFE_LOGO_NAME_FLAME.1_INCH  [SFE_LOGO_NAME_FLAME_.1]  27.94,52.07 0 bottom
LOGO19  OSHW-LOGOS  [OSHW-LOGO-S]  12.7,53.59 0 top
LOGO20  SFE_LOGO_NAME_FLAME.1_INCH  [SFE_LOGO_NAME_FLAME_.1]  16.15,52.07 0 top
LOGO21  OSHW-LOGOS  [OSHW-LOGO-S]  43.69,53.59 0 bottom
LOGO22  SFE_LOGO_NAME_FLAME.1_INCH  [SFE_LOGO_NAME_FLAME_.1]  58.93,52.07 0 bottom
LOGO23  OSHW-LOGOS  [OSHW-LOGO-S]  43.69,53.59 0 top
LOGO24  SFE_LOGO_NAME_FLAME.1_INCH  [SFE_LOGO_NAME_FLAME_.1]  47.14,52.07 0 top
LOGO25  OSHW-LOGOS  [OSHW-LOGO-S]  74.68,53.59 0 bottom
LOGO26  SFE_LOGO_NAME_FLAME.1_INCH  [SFE_LOGO_NAME_FLAME_.1]  89.92,52.07 0 bottom
LOGO27  OSHW-LOGOS  [OSHW-LOGO-S]  74.68,53.59 0 top
LOGO28  SFE_LOGO_NAME_FLAME.1_INCH  [SFE_LOGO_NAME_FLAME_.1]  78.13,52.07 0 top
LOGO29  OSHW-LOGOS  [OSHW-LOGO-S]  105.66,53.59 0 bottom
LOGO30  SFE_LOGO_NAME_FLAME.1_INCH  [SFE_LOGO_NAME_FLAME_.1]  120.9,52.07 0 bottom
LOGO31  OSHW-LOGOS  [OSHW-LOGO-S]  105.66,53.59 0 top
LOGO32  SFE_LOGO_NAME_FLAME.1_INCH  [SFE_LOGO_NAME_FLAME_.1]  109.12,52.07 0 top
LOGO33  OSHW-LOGOS  [OSHW-LOGO-S]  150.37,8.64 0 bottom
LOGO34  SFE_LOGO_NAME_FLAME.1_INCH  [SFE_LOGO_NAME_FLAME_.1]  165.61,7.11 0 bottom
LOGO35  OSHW-LOGOS  [OSHW-LOGO-S]  150.37,8.64 0 top
LOGO36  SFE_LOGO_NAME_FLAME.1_INCH  [SFE_LOGO_NAME_FLAME_.1]  153.82,7.11 0 top
LOGO37  OSHW-LOGOS  [OSHW-LOGO-S]  181.36,8.64 0 bottom
LOGO38  SFE_LOGO_NAME_FLAME.1_INCH  [SFE_LOGO_NAME_FLAME_.1]  196.6,7.11 0 bottom
LOGO39  OSHW-LOGOS  [OSHW-LOGO-S]  181.36,8.64 0 top
LOGO40  SFE_LOGO_NAME_FLAME.1_INCH  [SFE_LOGO_NAME_FLAME_.1]  184.81,7.11 0 top
LOGO41  OSHW-LOGOS  [OSHW-LOGO-S]  212.34,8.64 0 bottom
LOGO42  SFE_LOGO_NAME_FLAME.1_INCH  [SFE_LOGO_NAME_FLAME_.1]  227.58,7.11 0 bottom
LOGO43  OSHW-LOGOS  [OSHW-LOGO-S]  212.34,8.64 0 top
LOGO44  SFE_LOGO_NAME_FLAME.1_INCH  [SFE_LOGO_NAME_FLAME_.1]  215.8,7.11 0 top
LOGO45  OSHW-LOGOS  [OSHW-LOGO-S]  243.33,8.64 0 bottom
LOGO46  SFE_LOGO_NAME_FLAME.1_INCH  [SFE_LOGO_NAME_FLAME_.1]  258.57,7.11 0 bottom
LOGO47  OSHW-LOGOS  [OSHW-LOGO-S]  243.33,8.64 0 top
LOGO48  SFE_LOGO_NAME_FLAME.1_INCH  [SFE_LOGO_NAME_FLAME_.1]  246.79,7.11 0 top
LOGO49  OSHW-LOGOS  [OSHW-LOGO-S]  150.37,53.59 0 bottom
LOGO50  SFE_LOGO_NAME_FLAME.1_INCH  [SFE_LOGO_NAME_FLAME_.1]  165.61,52.07 0 bottom
LOGO51  OSHW-LOGOS  [OSHW-LOGO-S]  150.37,53.59 0 top
LOGO52  SFE_LOGO_NAME_FLAME.1_INCH  [SFE_LOGO_NAME_FLAME_.1]  153.82,52.07 0 top
LOGO53  OSHW-LOGOS  [OSHW-LOGO-S]  181.36,53.59 0 bottom
LOGO54  SFE_LOGO_NAME_FLAME.1_INCH  [SFE_LOGO_NAME_FLAME_.1]  196.6,52.07 0 bottom
LOGO55  OSHW-LOGOS  [OSHW-LOGO-S]  181.36,53.59 0 top
LOGO56  SFE_LOGO_NAME_FLAME.1_INCH  [SFE_LOGO_NAME_FLAME_.1]  184.81,52.07 0 top
LOGO57  OSHW-LOGOS  [OSHW-LOGO-S]  212.34,53.59 0 bottom
LOGO58  SFE_LOGO_NAME_FLAME.1_INCH  [SFE_LOGO_NAME_FLAME_.1]  227.58,52.07 0 bottom
LOGO59  OSHW-LOGOS  [OSHW-LOGO-S]  212.34,53.59 0 top
LOGO60  SFE_LOGO_NAME_FLAME.1_INCH  [SFE_LOGO_NAME_FLAME_.1]  215.8,52.07 0 top
LOGO61  OSHW-LOGOS  [OSHW-LOGO-S]  243.33,53.59 0 bottom
LOGO62  SFE_LOGO_NAME_FLAME.1_INCH  [SFE_LOGO_NAME_FLAME_.1]  258.57,52.07 0 bottom
LOGO63  OSHW-LOGOS  [OSHW-LOGO-S]  243.33,53.59 0 top
LOGO64  SFE_LOGO_NAME_FLAME.1_INCH  [SFE_LOGO_NAME_FLAME_.1]  246.79,52.07 0 top
LOGO65  OSHW-LOGOS  [OSHW-LOGO-S]  12.7,112.27 0 bottom
LOGO66  SFE_LOGO_NAME_FLAME.1_INCH  [SFE_LOGO_NAME_FLAME_.1]  27.94,110.74 0 bottom
LOGO67  OSHW-LOGOS  [OSHW-LOGO-S]  12.7,112.27 0 top
LOGO68  SFE_LOGO_NAME_FLAME.1_INCH  [SFE_LOGO_NAME_FLAME_.1]  16.15,110.74 0 top
LOGO69  OSHW-LOGOS  [OSHW-LOGO-S]  43.69,112.27 0 bottom
LOGO70  SFE_LOGO_NAME_FLAME.1_INCH  [SFE_LOGO_NAME_FLAME_.1]  58.93,110.74 0 bottom
LOGO71  OSHW-LOGOS  [OSHW-LOGO-S]  43.69,112.27 0 top
LOGO72  SFE_LOGO_NAME_FLAME.1_INCH  [SFE_LOGO_NAME_FLAME_.1]  47.14,110.74 0 top
LOGO73  OSHW-LOGOS  [OSHW-LOGO-S]  74.68,112.27 0 bottom
LOGO74  SFE_LOGO_NAME_FLAME.1_INCH  [SFE_LOGO_NAME_FLAME_.1]  89.92,110.74 0 bottom
LOGO75  OSHW-LOGOS  [OSHW-LOGO-S]  74.68,112.27 0 top
LOGO76  SFE_LOGO_NAME_FLAME.1_INCH  [SFE_LOGO_NAME_FLAME_.1]  78.13,110.74 0 top
LOGO77  OSHW-LOGOS  [OSHW-LOGO-S]  105.66,112.27 0 bottom
LOGO78  SFE_LOGO_NAME_FLAME.1_INCH  [SFE_LOGO_NAME_FLAME_.1]  120.9,110.74 0 bottom
LOGO79  OSHW-LOGOS  [OSHW-LOGO-S]  105.66,112.27 0 top
LOGO80  SFE_LOGO_NAME_FLAME.1_INCH  [SFE_LOGO_NAME_FLAME_.1]  109.12,110.74 0 top
LOGO81  OSHW-LOGOS  [OSHW-LOGO-S]  12.7,157.23 0 bottom
LOGO82  SFE_LOGO_NAME_FLAME.1_INCH  [SFE_LOGO_NAME_FLAME_.1]  27.94,155.7 0 bottom
LOGO83  OSHW-LOGOS  [OSHW-LOGO-S]  12.7,157.23 0 top
LOGO84  SFE_LOGO_NAME_FLAME.1_INCH  [SFE_LOGO_NAME_FLAME_.1]  16.15,155.7 0 top
LOGO85  OSHW-LOGOS  [OSHW-LOGO-S]  43.69,157.23 0 bottom
LOGO86  SFE_LOGO_NAME_FLAME.1_INCH  [SFE_LOGO_NAME_FLAME_.1]  58.93,155.7 0 bottom
LOGO87  OSHW-LOGOS  [OSHW-LOGO-S]  43.69,157.23 0 top
LOGO88  SFE_LOGO_NAME_FLAME.1_INCH  [SFE_LOGO_NAME_FLAME_.1]  47.14,155.7 0 top
LOGO89  OSHW-LOGOS  [OSHW-LOGO-S]  74.68,157.23 0 bottom
LOGO90  SFE_LOGO_NAME_FLAME.1_INCH  [SFE_LOGO_NAME_FLAME_.1]  89.92,155.7 0 bottom
LOGO91  OSHW-LOGOS  [OSHW-LOGO-S]  74.68,157.23 0 top
LOGO92  SFE_LOGO_NAME_FLAME.1_INCH  [SFE_LOGO_NAME_FLAME_.1]  78.13,155.7 0 top
LOGO93  OSHW-LOGOS  [OSHW-LOGO-S]  105.66,157.23 0 bottom
LOGO94  SFE_LOGO_NAME_FLAME.1_INCH  [SFE_LOGO_NAME_FLAME_.1]  120.9,155.7 0 bottom
LOGO95  OSHW-LOGOS  [OSHW-LOGO-S]  105.66,157.23 0 top
LOGO96  SFE_LOGO_NAME_FLAME.1_INCH  [SFE_LOGO_NAME_FLAME_.1]  109.12,155.7 0 top
LOGO97  OSHW-LOGOS  [OSHW-LOGO-S]  150.37,112.27 0 bottom
LOGO98  SFE_LOGO_NAME_FLAME.1_INCH  [SFE_LOGO_NAME_FLAME_.1]  165.61,110.74 0 bottom
LOGO99  OSHW-LOGOS  [OSHW-LOGO-S]  150.37,112.27 0 top
LOGO100  SFE_LOGO_NAME_FLAME.1_INCH  [SFE_LOGO_NAME_FLAME_.1]  153.82,110.74 0 top
LOGO101  OSHW-LOGOS  [OSHW-LOGO-S]  181.36,112.27 0 bottom
LOGO102  SFE_LOGO_NAME_FLAME.1_INCH  [SFE_LOGO_NAME_FLAME_.1]  196.6,110.74 0 bottom
LOGO103  OSHW-LOGOS  [OSHW-LOGO-S]  181.36,112.27 0 top
LOGO104  SFE_LOGO_NAME_FLAME.1_INCH  [SFE_LOGO_NAME_FLAME_.1]  184.81,110.74 0 top
LOGO105  OSHW-LOGOS  [OSHW-LOGO-S]  212.34,112.27 0 bottom
LOGO106  SFE_LOGO_NAME_FLAME.1_INCH  [SFE_LOGO_NAME_FLAME_.1]  227.58,110.74 0 bottom
LOGO107  OSHW-LOGOS  [OSHW-LOGO-S]  212.34,112.27 0 top
LOGO108  SFE_LOGO_NAME_FLAME.1_INCH  [SFE_LOGO_NAME_FLAME_.1]  215.8,110.74 0 top
LOGO109  OSHW-LOGOS  [OSHW-LOGO-S]  243.33,112.27 0 bottom
LOGO110  SFE_LOGO_NAME_FLAME.1_INCH  [SFE_LOGO_NAME_FLAME_.1]  258.57,110.74 0 bottom
LOGO111  OSHW-LOGOS  [OSHW-LOGO-S]  243.33,112.27 0 top
LOGO112  SFE_LOGO_NAME_FLAME.1_INCH  [SFE_LOGO_NAME_FLAME_.1]  246.79,110.74 0 top
LOGO113  OSHW-LOGOS  [OSHW-LOGO-S]  150.37,157.23 0 bottom
LOGO114  SFE_LOGO_NAME_FLAME.1_INCH  [SFE_LOGO_NAME_FLAME_.1]  165.61,155.7 0 bottom
LOGO115  OSHW-LOGOS  [OSHW-LOGO-S]  150.37,157.23 0 top
LOGO116  SFE_LOGO_NAME_FLAME.1_INCH  [SFE_LOGO_NAME_FLAME_.1]  153.82,155.7 0 top
LOGO117  OSHW-LOGOS  [OSHW-LOGO-S]  181.36,157.23 0 bottom
LOGO118  SFE_LOGO_NAME_FLAME.1_INCH  [SFE_LOGO_NAME_FLAME_.1]  196.6,155.7 0 bottom
LOGO119  OSHW-LOGOS  [OSHW-LOGO-S]  181.36,157.23 0 top
LOGO120  SFE_LOGO_NAME_FLAME.1_INCH  [SFE_LOGO_NAME_FLAME_.1]  184.81,155.7 0 top
LOGO121  OSHW-LOGOS  [OSHW-LOGO-S]  212.34,157.23 0 bottom
LOGO122  SFE_LOGO_NAME_FLAME.1_INCH  [SFE_LOGO_NAME_FLAME_.1]  227.58,155.7 0 bottom
LOGO123  OSHW-LOGOS  [OSHW-LOGO-S]  212.34,157.23 0 top
LOGO124  SFE_LOGO_NAME_FLAME.1_INCH  [SFE_LOGO_NAME_FLAME_.1]  215.8,155.7 0 top
LOGO125  OSHW-LOGOS  [OSHW-LOGO-S]  243.33,157.23 0 bottom
LOGO126  SFE_LOGO_NAME_FLAME.1_INCH  [SFE_LOGO_NAME_FLAME_.1]  258.57,155.7 0 bottom
LOGO127  OSHW-LOGOS  [OSHW-LOGO-S]  243.33,157.23 0 top
LOGO128  SFE_LOGO_NAME_FLAME.1_INCH  [SFE_LOGO_NAME_FLAME_.1]  246.79,155.7 0 top
U1  USD-SOCKETNEW  [MICRO-SD-SOCKET-PP]  28.45,34.8 0 top
U2  EDISON_CONNECTOR_FULLMOUNTING_HOLES  [EDISON_DAUGHTER]  34.8,10.67 0 bottom
U3  EDISON_CONNECTOR_FULLHEADER  [DF40C-70DP-0.4(51)]  31.5,23.04 90 bottom
U4  TXB0108  [UFDFN-20]  17.02,29.97 0 top
U5  EDISON_CONNECTOR_FULLMOUNTING_HOLES  [EDISON_DAUGHTER]  65.79,10.67 0 bottom
U6  EDISON_CONNECTOR_FULLHEADER  [DF40C-70DP-0.4(51)]  62.49,23.04 90 bottom
U7  USD-SOCKETNEW  [MICRO-SD-SOCKET-PP]  59.44,34.8 0 top
U8  TXB0108  [UFDFN-20]  48.01,29.97 0 top
U9  EDISON_CONNECTOR_FULLMOUNTING_HOLES  [EDISON_DAUGHTER]  96.77,10.67 0 bottom
U10  EDISON_CONNECTOR_FULLHEADER  [DF40C-70DP-0.4(51)]  93.47,23.04 90 bottom
U11  USD-SOCKETNEW  [MICRO-SD-SOCKET-PP]  90.42,34.8 0 top
U12  TXB0108  [UFDFN-20]  78.99,29.97 0 top
U13  EDISON_CONNECTOR_FULLMOUNTING_HOLES  [EDISON_DAUGHTER]  127.76,10.67 0 bottom
U14  EDISON_CONNECTOR_FULLHEADER  [DF40C-70DP-0.4(51)]  124.46,23.04 90 bottom
U15  USD-SOCKETNEW  [MICRO-SD-SOCKET-PP]  121.41,34.8 0 top
U16  TXB0108  [UFDFN-20]  109.98,29.97 0 top
U17  EDISON_CONNECTOR_FULLMOUNTING_HOLES  [EDISON_DAUGHTER]  34.8,55.63 0 bottom
U18  EDISON_CONNECTOR_FULLHEADER  [DF40C-70DP-0.4(51)]  31.5,68 90 bottom
U19  USD-SOCKETNEW  [MICRO-SD-SOCKET-PP]  28.45,79.76 0 top
U20  TXB0108  [UFDFN-20]  17.02,74.93 0 top
U21  EDISON_CONNECTOR_FULLMOUNTING_HOLES  [EDISON_DAUGHTER]  65.79,55.63 0 bottom
U22  EDISON_CONNECTOR_FULLHEADER  [DF40C-70DP-0.4(51)]  62.49,68 90 bottom
U23  USD-SOCKETNEW  [MICRO-SD-SOCKET-PP]  59.44,79.76 0 top
U24  TXB0108  [UFDFN-20]  48.01,74.93 0 top
U25  EDISON_CONNECTOR_FULLMOUNTING_HOLES  [EDISON_DAUGHTER]  96.77,55.63 0 bottom
U26  EDISON_CONNECTOR_FULLHEADER  [DF40C-70DP-0.4(51)]  93.47,68 90 bottom
U27  USD-SOCKETNEW  [MICRO-SD-SOCKET-PP]  90.42,79.76 0 top
U28  TXB0108  [UFDFN-20]  78.99,74.93 0 top
U29  EDISON_CONNECTOR_FULLMOUNTING_HOLES  [EDISON_DAUGHTER]  127.76,55.63 0 bottom
U30  EDISON_CONNECTOR_FULLHEADER  [DF40C-70DP-0.4(51)]  124.46,68 90 bottom
U31  USD-SOCKETNEW  [MICRO-SD-SOCKET-PP]  121.41,79.76 0 top
U32  TXB0108  [UFDFN-20]  109.98,74.93 0 top
U33  EDISON_CONNECTOR_FULLMOUNTING_HOLES  [EDISON_DAUGHTER]  172.47,10.67 0 bottom
U34  EDISON_CONNECTOR_FULLHEADER  [DF40C-70DP-0.4(51)]  169.17,23.04 90 bottom
U35  USD-SOCKETNEW  [MICRO-SD-SOCKET-PP]  166.12,34.8 0 top
U36  TXB0108  [UFDFN-20]  154.69,29.97 0 top
U37  EDISON_CONNECTOR_FULLMOUNTING_HOLES  [EDISON_DAUGHTER]  203.45,10.67 0 bottom
U38  EDISON_CONNECTOR_FULLHEADER  [DF40C-70DP-0.4(51)]  200.15,23.04 90 bottom
U39  USD-SOCKETNEW  [MICRO-SD-SOCKET-PP]  197.1,34.8 0 top
U40  TXB0108  [UFDFN-20]  185.67,29.97 0 top
U41  EDISON_CONNECTOR_FULLMOUNTING_HOLES  [EDISON_DAUGHTER]  234.44,10.67 0 bottom
U42  EDISON_CONNECTOR_FULLHEADER  [DF40C-70DP-0.4(51)]  231.14,23.04 90 bottom
U43  USD-SOCKETNEW  [MICRO-SD-SOCKET-PP]  228.09,34.8 0 top
U44  TXB0108  [UFDFN-20]  216.66,29.97 0 top
U45  EDISON_CONNECTOR_FULLMOUNTING_HOLES  [EDISON_DAUGHTER]  265.43,10.67 0 bottom
U46  EDISON_CONNECTOR_FULLHEADER  [DF40C-70DP-0.4(51)]  262.13,23.04 90 bottom
U47  USD-SOCKETNEW  [MICRO-SD-SOCKET-PP]  259.08,34.8 0 top
U48  TXB0108  [UFDFN-20]  247.65,29.97 0 top
U49  EDISON_CONNECTOR_FULLMOUNTING_HOLES  [EDISON_DAUGHTER]  172.47,55.63 0 bottom
U50  EDISON_CONNECTOR_FULLHEADER  [DF40C-70DP-0.4(51)]  169.17,68 90 bottom
U51  USD-SOCKETNEW  [MICRO-SD-SOCKET-PP]  166.12,79.76 0 top
U52  TXB0108  [UFDFN-20]  154.69,74.93 0 top
U53  EDISON_CONNECTOR_FULLMOUNTING_HOLES  [EDISON_DAUGHTER]  203.45,55.63 0 bottom
U54  EDISON_CONNECTOR_FULLHEADER  [DF40C-70DP-0.4(51)]  200.15,68 90 bottom
U55  USD-SOCKETNEW  [MICRO-SD-SOCKET-PP]  197.1,79.76 0 top
U56  TXB0108  [UFDFN-20]  185.67,74.93 0 top
U57  EDISON_CONNECTOR_FULLMOUNTING_HOLES  [EDISON_DAUGHTER]  234.44,55.63 0 bottom
U58  EDISON_CONNECTOR_FULLHEADER  [DF40C-70DP-0.4(51)]  231.14,68 90 bottom
U59  USD-SOCKETNEW  [MICRO-SD-SOCKET-PP]  228.09,79.76 0 top
U60  TXB0108  [UFDFN-20]  216.66,74.93 0 top
U61  EDISON_CONNECTOR_FULLMOUNTING_HOLES  [EDISON_DAUGHTER]  265.43,55.63 0 bottom
U62  EDISON_CONNECTOR_FULLHEADER  [DF40C-70DP-0.4(51)]  262.13,68 90 bottom
U63  USD-SOCKETNEW  [MICRO-SD-SOCKET-PP]  259.08,79.76 0 top
U64  TXB0108  [UFDFN-20]  247.65,74.93 0 top
U65  EDISON_CONNECTOR_FULLMOUNTING_HOLES  [EDISON_DAUGHTER]  34.8,114.3 0 bottom
U66  EDISON_CONNECTOR_FULLHEADER  [DF40C-70DP-0.4(51)]  31.5,126.67 90 bottom
U67  USD-SOCKETNEW  [MICRO-SD-SOCKET-PP]  28.45,138.43 0 top
U68  TXB0108  [UFDFN-20]  17.02,133.6 0 top
U69  EDISON_CONNECTOR_FULLMOUNTING_HOLES  [EDISON_DAUGHTER]  65.79,114.3 0 bottom
U70  EDISON_CONNECTOR_FULLHEADER  [DF40C-70DP-0.4(51)]  62.49,126.67 90 bottom
U71  USD-SOCKETNEW  [MICRO-SD-SOCKET-PP]  59.44,138.43 0 top
U72  TXB0108  [UFDFN-20]  48.01,133.6 0 top
U73  EDISON_CONNECTOR_FULLMOUNTING_HOLES  [EDISON_DAUGHTER]  96.77,114.3 0 bottom
U74  EDISON_CONNECTOR_FULLHEADER  [DF40C-70DP-0.4(51)]  93.47,126.67 90 bottom
U75  USD-SOCKETNEW  [MICRO-SD-SOCKET-PP]  90.42,138.43 0 top
U76  TXB0108  [UFDFN-20]  78.99,133.6 0 top
U77  EDISON_CONNECTOR_FULLMOUNTING_HOLES  [EDISON_DAUGHTER]  127.76,114.3 0 bottom
U78  EDISON_CONNECTOR_FULLHEADER  [DF40C-70DP-0.4(51)]  124.46,126.67 90 bottom
U79  USD-SOCKETNEW  [MICRO-SD-SOCKET-PP]  121.41,138.43 0 top
U80  TXB0108  [UFDFN-20]  109.98,133.6 0 top
U81  EDISON_CONNECTOR_FULLMOUNTING_HOLES  [EDISON_DAUGHTER]  34.8,159.26 0 bottom
U82  EDISON_CONNECTOR_FULLHEADER  [DF40C-70DP-0.4(51)]  31.5,171.63 90 bottom
U83  USD-SOCKETNEW  [MICRO-SD-SOCKET-PP]  28.45,183.39 0 top
U84  TXB0108  [UFDFN-20]  17.02,178.56 0 top
U85  EDISON_CONNECTOR_FULLMOUNTING_HOLES  [EDISON_DAUGHTER]  65.79,159.26 0 bottom
U86  EDISON_CONNECTOR_FULLHEADER  [DF40C-70DP-0.4(51)]  62.49,171.63 90 bottom
U87  USD-SOCKETNEW  [MICRO-SD-SOCKET-PP]  59.44,183.39 0 top
U88  TXB0108  [UFDFN-20]  48.01,178.56 0 top
U89  EDISON_CONNECTOR_FULLMOUNTING_HOLES  [EDISON_DAUGHTER]  96.77,159.26 0 bottom
U90  EDISON_CONNECTOR_FULLHEADER  [DF40C-70DP-0.4(51)]  93.47,171.63 90 bottom
U91  USD-SOCKETNEW  [MICRO-SD-SOCKET-PP]  90.42,183.39 0 top
U92  TXB0108  [UFDFN-20]  78.99,178.56 0 top
U93  EDISON_CONNECTOR_FULLMOUNTING_HOLES  [EDISON_DAUGHTER]  127.76,159.26 0 bottom
U94  EDISON_CONNECTOR_FULLHEADER  [DF40C-70DP-0.4(51)]  124.46,171.63 90 bottom
U95  USD-SOCKETNEW  [MICRO-SD-SOCKET-PP]  121.41,183.39 0 top
U96  TXB0108  [UFDFN-20]  109.98,178.56 0 top
U97  EDISON_CONNECTOR_FULLMOUNTING_HOLES  [EDISON_DAUGHTER]  172.47,114.3 0 bottom
U98  EDISON_CONNECTOR_FULLHEADER  [DF40C-70DP-0.4(51)]  169.17,126.67 90 bottom
U99  USD-SOCKETNEW  [MICRO-SD-SOCKET-PP]  166.12,138.43 0 top
U100  TXB0108  [UFDFN-20]  154.69,133.6 0 top
U101  EDISON_CONNECTOR_FULLMOUNTING_HOLES  [EDISON_DAUGHTER]  203.45,114.3 0 bottom
U102  EDISON_CONNECTOR_FULLHEADER  [DF40C-70DP-0.4(51)]  200.15,126.67 90 bottom
U103  USD-SOCKETNEW  [MICRO-SD-SOCKET-PP]  197.1,138.43 0 top
U104  TXB0108  [UFDFN-20]  185.67,133.6 0 top
U105  EDISON_CONNECTOR_FULLMOUNTING_HOLES  [EDISON_DAUGHTER]  234.44,114.3 0 bottom
U106  EDISON_CONNECTOR_FULLHEADER  [DF40C-70DP-0.4(51)]  231.14,126.67 90 bottom
U107  USD-SOCKETNEW  [MICRO-SD-SOCKET-PP]  228.09,138.43 0 top
U108  TXB0108  [UFDFN-20]  216.66,133.6 0 top
U109  EDISON_CONNECTOR_FULLMOUNTING_HOLES  [EDISON_DAUGHTER]  265.43,114.3 0 bottom
U110  EDISON_CONNECTOR_FULLHEADER  [DF40C-70DP-0.4(51)]  262.13,126.67 90 bottom
U111  USD-SOCKETNEW  [MICRO-SD-SOCKET-PP]  259.08,138.43 0 top
U112  TXB0108  [UFDFN-20]  247.65,133.6 0 top
U113  EDISON_CONNECTOR_FULLMOUNTING_HOLES  [EDISON_DAUGHTER]  172.47,159.26 0 bottom
U114  EDISON_CONNECTOR_FULLHEADER  [DF40C-70DP-0.4(51)]  169.17,171.63 90 bottom
U115  USD-SOCKETNEW  [MICRO-SD-SOCKET-PP]  166.12,183.39 0 top
U116  TXB0108  [UFDFN-20]  154.69,178.56 0 top
U117  EDISON_CONNECTOR_FULLMOUNTING_HOLES  [EDISON_DAUGHTER]  203.45,159.26 0 bottom
U118  EDISON_CONNECTOR_FULLHEADER  [DF40C-70DP-0.4(51)]  200.15,171.63 90 bottom
U119  USD-SOCKETNEW  [MICRO-SD-SOCKET-PP]  197.1,183.39 0 top
U120  TXB0108  [UFDFN-20]  185.67,178.56 0 top
U121  EDISON_CONNECTOR_FULLMOUNTING_HOLES  [EDISON_DAUGHTER]  234.44,159.26 0 bottom
U122  EDISON_CONNECTOR_FULLHEADER  [DF40C-70DP-0.4(51)]  231.14,171.63 90 bottom
U123  USD-SOCKETNEW  [MICRO-SD-SOCKET-PP]  228.09,183.39 0 top
U124  TXB0108  [UFDFN-20]  216.66,178.56 0 top
U125  EDISON_CONNECTOR_FULLMOUNTING_HOLES  [EDISON_DAUGHTER]  265.43,159.26 0 bottom
U126  EDISON_CONNECTOR_FULLHEADER  [DF40C-70DP-0.4(51)]  262.13,171.63 90 bottom
U127  USD-SOCKETNEW  [MICRO-SD-SOCKET-PP]  259.08,183.39 0 top
U128  TXB0108  [UFDFN-20]  247.65,178.56 0 top

## Library data of the parts
C1-C64 = SparkFun-Capacitors; PROD_ID: CAP-00810
E$1 E$2 E$9 E$10 E$15 E$16 E$21 E$22 = SparkFun-Retired
E$3-E$8 E$11-E$14 E$17-E$20 E$23 E$24 FID1-FID128 LOGO1-LOGO128 = SparkFun-Aesthetics
U1 U7 U11 U15 U19 U23 U27 U31 U35 U39 U43 U47 U51 U55 U59 U63 U67 U71 U75 U79 U83 U87 U91 U95 U99 U103 U107 U111 U115 U119 U123 U127 = SparkFun-Connectors
U2 U3 U5 U6 U9 U10 U13 U14 U17 U18 U21 U22 U25 U26 U29 U30 U33 U34 U37 U38 U41 U42 U45 U46 U49 U50 U53 U54 U57 U58 U61 U62 U65 U66 U69 U70 U73 U74 U77 U78 U81 U82 U85 U86 U89 U90 U93 U94 U97 U98 U101 U102 U105 U106 U109 U110 U113 U114 U117 U118 U121 U122 U125 U126 = Edison
U4 U8 U12 U16 U20 U24 U28 U32 U36 U40 U44 U48 U52 U56 U60 U64 U68 U72 U76 U80 U84 U88 U92 U96 U100 U104 U108 U112 U116 U120 U124 U128 = Testing

## Nets
1.8V: C1.1 U2.12 U3.12 U4.P$5 U4.P$6
1.8V1: C3.1 U5.12 U6.12 U8.P$5 U8.P$6
1.8V2: C5.1 U9.12 U10.12 U12.P$5 U12.P$6
1.8V3: C7.1 U13.12 U14.12 U16.P$5 U16.P$6
1.8V4: C9.1 U17.12 U18.12 U20.P$5 U20.P$6
1.8V5: C11.1 U21.12 U22.12 U24.P$5 U24.P$6
1.8V6: C13.1 U25.12 U26.12 U28.P$5 U28.P$6
1.8V7: C15.1 U29.12 U30.12 U32.P$5 U32.P$6
1.8V8: C17.1 U33.12 U34.12 U36.P$5 U36.P$6
1.8V9: C19.1 U37.12 U38.12 U40.P$5 U40.P$6
1.8V10: C21.1 U41.12 U42.12 U44.P$5 U44.P$6
1.8V11: C23.1 U45.12 U46.12 U48.P$5 U48.P$6
1.8V12: C25.1 U49.12 U50.12 U52.P$5 U52.P$6
1.8V13: C27.1 U53.12 U54.12 U56.P$5 U56.P$6
1.8V14: C29.1 U57.12 U58.12 U60.P$5 U60.P$6
1.8V15: C31.1 U61.12 U62.12 U64.P$5 U64.P$6
1.8V16: C33.1 U65.12 U66.12 U68.P$5 U68.P$6
1.8V17: C35.1 U69.12 U70.12 U72.P$5 U72.P$6
1.8V18: C37.1 U73.12 U74.12 U76.P$5 U76.P$6
1.8V19: C39.1 U77.12 U78.12 U80.P$5 U80.P$6
1.8V20: C41.1 U81.12 U82.12 U84.P$5 U84.P$6
1.8V21: C43.1 U85.12 U86.12 U88.P$5 U88.P$6
1.8V22: C45.1 U89.12 U90.12 U92.P$5 U92.P$6
1.8V23: C47.1 U93.12 U94.12 U96.P$5 U96.P$6
1.8V24: C49.1 U97.12 U98.12 U100.P$5 U100.P$6
1.8V25: C51.1 U101.12 U102.12 U104.P$5 U104.P$6
1.8V26: C53.1 U105.12 U106.12 U108.P$5 U108.P$6
1.8V27: C55.1 U109.12 U110.12 U112.P$5 U112.P$6
1.8V28: C57.1 U113.12 U114.12 U116.P$5 U116.P$6
1.8V29: C59.1 U117.12 U118.12 U120.P$5 U120.P$6
1.8V30: C61.1 U121.12 U122.12 U124.P$5 U124.P$6
1.8V31: C63.1 U125.12 U126.12 U128.P$5 U128.P$6
3.3V: C2.1 U1.4 U2.8 U2.10 U3.8 U3.10 U4.P$16
3.3V1: C4.1 U5.8 U5.10 U6.8 U6.10 U7.4 U8.P$16
3.3V2: C6.1 U9.8 U9.10 U10.8 U10.10 U11.4 U12.P$16
3.3V3: C8.1 U13.8 U13.10 U14.8 U14.10 U15.4 U16.P$16
3.3V4: C10.1 U17.8 U17.10 U18.8 U18.10 U19.4 U20.P$16
3.3V5: C12.1 U21.8 U21.10 U22.8 U22.10 U23.4 U24.P$16
3.3V6: C14.1 U25.8 U25.10 U26.8 U26.10 U27.4 U28.P$16
3.3V7: C16.1 U29.8 U29.10 U30.8 U30.10 U31.4 U32.P$16
3.3V8: C18.1 U33.8 U33.10 U34.8 U34.10 U35.4 U36.P$16
3.3V9: C20.1 U37.8 U37.10 U38.8 U38.10 U39.4 U40.P$16
3.3V10: C22.1 U41.8 U41.10 U42.8 U42.10 U43.4 U44.P$16
3.3V11: C24.1 U45.8 U45.10 U46.8 U46.10 U47.4 U48.P$16
3.3V12: C26.1 U49.8 U49.10 U50.8 U50.10 U51.4 U52.P$16
3.3V13: C28.1 U53.8 U53.10 U54.8 U54.10 U55.4 U56.P$16
3.3V14: C30.1 U57.8 U57.10 U58.8 U58.10 U59.4 U60.P$16
3.3V15: C32.1 U61.8 U61.10 U62.8 U62.10 U63.4 U64.P$16
3.3V16: C34.1 U65.8 U65.10 U66.8 U66.10 U67.4 U68.P$16
3.3V17: C36.1 U69.8 U69.10 U70.8 U70.10 U71.4 U72.P$16
3.3V18: C38.1 U73.8 U73.10 U74.8 U74.10 U75.4 U76.P$16
3.3V19: C40.1 U77.8 U77.10 U78.8 U78.10 U79.4 U80.P$16
3.3V20: C42.1 U81.8 U81.10 U82.8 U82.10 U83.4 U84.P$16
3.3V21: C44.1 U85.8 U85.10 U86.8 U86.10 U87.4 U88.P$16
3.3V22: C46.1 U89.8 U89.10 U90.8 U90.10 U91.4 U92.P$16
3.3V23: C48.1 U93.8 U93.10 U94.8 U94.10 U95.4 U96.P$16
3.3V24: C50.1 U97.8 U97.10 U98.8 U98.10 U99.4 U100.P$16
3.3V25: C52.1 U101.8 U101.10 U102.8 U102.10 U103.4 U104.P$16
3.3V26: C54.1 U105.8 U105.10 U106.8 U106.10 U107.4 U108.P$16
3.3V27: C56.1 U109.8 U109.10 U110.8 U110.10 U111.4 U112.P$16
3.3V28: C58.1 U113.8 U113.10 U114.8 U114.10 U115.4 U116.P$16
3.3V29: C60.1 U117.8 U117.10 U118.8 U118.10 U119.4 U120.P$16
3.3V30: C62.1 U121.8 U121.10 U122.8 U122.10 U123.4 U124.P$16
3.3V31: C64.1 U125.8 U125.10 U126.8 U126.10 U127.4 U128.P$16
DCIN: U2.14 U3.14
DCIN1: U5.14 U6.14
DCIN2: U9.14 U10.14
DCIN3: U13.14 U14.14
DCIN4: U17.14 U18.14
DCIN5: U21.14 U22.14
DCIN6: U25.14 U26.14
DCIN7: U29.14 U30.14
DCIN8: U33.14 U34.14
DCIN9: U37.14 U38.14
DCIN10: U41.14 U42.14
DCIN11: U45.14 U46.14
DCIN12: U49.14 U50.14
DCIN13: U53.14 U54.14
DCIN14: U57.14 U58.14
DCIN15: U61.14 U62.14
DCIN16: U65.14 U66.14
DCIN17: U69.14 U70.14
DCIN18: U73.14 U74.14
DCIN19: U77.14 U78.14
DCIN20: U81.14 U82.14
DCIN21: U85.14 U86.14
DCIN22: U89.14 U90.14
DCIN23: U93.14 U94.14
DCIN24: U97.14 U98.14
DCIN25: U101.14 U102.14
DCIN26: U105.14 U106.14
DCIN27: U109.14 U110.14
DCIN28: U113.14 U114.14
DCIN29: U117.14 U118.14
DCIN30: U121.14 U122.14
DCIN31: U125.14 U126.14
FAULT: U2.19 U3.19
FAULT1: U5.19 U6.19
FAULT2: U9.19 U10.19
FAULT3: U13.19 U14.19
FAULT4: U17.19 U18.19
FAULT5: U21.19 U22.19
FAULT6: U25.19 U26.19
FAULT7: U29.19 U30.19
FAULT8: U33.19 U34.19
FAULT9: U37.19 U38.19
FAULT10: U41.19 U42.19
FAULT11: U45.19 U46.19
FAULT12: U49.19 U50.19
FAULT13: U53.19 U54.19
FAULT14: U57.19 U58.19
FAULT15: U61.19 U62.19
FAULT16: U65.19 U66.19
FAULT17: U69.19 U70.19
FAULT18: U73.19 U74.19
FAULT19: U77.19 U78.19
FAULT20: U81.19 U82.19
FAULT21: U85.19 U86.19
FAULT22: U89.19 U90.19
FAULT23: U93.19 U94.19
FAULT24: U97.19 U98.19
FAULT25: U101.19 U102.19
FAULT26: U105.19 U106.19
FAULT27: U109.19 U110.19
FAULT28: U113.19 U114.19
FAULT29: U117.19 U118.19
FAULT30: U121.19 U122.19
FAULT31: U125.19 U126.19
FW_RCVR: U2.69 U3.69
FW_RCVR1: U5.69 U6.69
FW_RCVR2: U9.69 U10.69
FW_RCVR3: U13.69 U14.69
FW_RCVR4: U17.69 U18.69
FW_RCVR5: U21.69 U22.69
FW_RCVR6: U25.69 U26.69
FW_RCVR7: U29.69 U30.69
FW_RCVR8: U33.69 U34.69
FW_RCVR9: U37.69 U38.69
FW_RCVR10: U41.69 U42.69
FW_RCVR11: U45.69 U46.69
FW_RCVR12: U49.69 U50.69
FW_RCVR13: U53.69 U54.69
FW_RCVR14: U57.69 U58.69
FW_RCVR15: U61.69 U62.69
FW_RCVR16: U65.69 U66.69
FW_RCVR17: U69.69 U70.69
FW_RCVR18: U73.69 U74.69
FW_RCVR19: U77.69 U78.69
FW_RCVR20: U81.69 U82.69
FW_RCVR21: U85.69 U86.69
FW_RCVR22: U89.69 U90.69
FW_RCVR23: U93.69 U94.69
FW_RCVR24: U97.69 U98.69
FW_RCVR25: U101.69 U102.69
FW_RCVR26: U105.69 U106.69
FW_RCVR27: U109.69 U110.69
FW_RCVR28: U113.69 U114.69
FW_RCVR29: U117.69 U118.69
FW_RCVR30: U121.69 U122.69
FW_RCVR31: U125.69 U126.69
GND: C1.2 C2.2 U1.6 U1.GND1 U1.GND3 U2.1 U2.5 U2.9 U2.11 U2.13 U2.15 U3.1 U3.5 U3.9 U3.11 U3.13 U3.15 U4.P$15
GND1: C3.2 C4.2 U5.1 U5.5 U5.9 U5.11 U5.13 U5.15 U6.1 U6.5 U6.9 U6.11 U6.13 U6.15 U7.6 U7.GND1 U7.GND3 U8.P$15
GND2: C5.2 C6.2 U9.1 U9.5 U9.9 U9.11 U9.13 U9.15 U10.1 U10.5 U10.9 U10.11 U10.13 U10.15 U11.6 U11.GND1 U11.GND3 U12.P$15
GND3: C7.2 C8.2 U13.1 U13.5 U13.9 U13.11 U13.13 U13.15 U14.1 U14.5 U14.9 U14.11 U14.13 U14.15 U15.6 U15.GND1 U15.GND3 U16.P$15
GND4: C9.2 C10.2 U17.1 U17.5 U17.9 U17.11 U17.13 U17.15 U18.1 U18.5 U18.9 U18.11 U18.13 U18.15 U19.6 U19.GND1 U19.GND3 U20.P$15
GND5: C11.2 C12.2 U21.1 U21.5 U21.9 U21.11 U21.13 U21.15 U22.1 U22.5 U22.9 U22.11 U22.13 U22.15 U23.6 U23.GND1 U23.GND3 U24.P$15
GND6: C13.2 C14.2 U25.1 U25.5 U25.9 U25.11 U25.13 U25.15 U26.1 U26.5 U26.9 U26.11 U26.13 U26.15 U27.6 U27.GND1 U27.GND3 U28.P$15
GND7: C15.2 C16.2 U29.1 U29.5 U29.9 U29.11 U29.13 U29.15 U30.1 U30.5 U30.9 U30.11 U30.13 U30.15 U31.6 U31.GND1 U31.GND3 U32.P$15
GND8: C17.2 C18.2 U33.1 U33.5 U33.9 U33.11 U33.13 U33.15 U34.1 U34.5 U34.9 U34.11 U34.13 U34.15 U35.6 U35.GND1 U35.GND3 U36.P$15
GND9: C19.2 C20.2 U37.1 U37.5 U37.9 U37.11 U37.13 U37.15 U38.1 U38.5 U38.9 U38.11 U38.13 U38.15 U39.6 U39.GND1 U39.GND3 U40.P$15
GND10: C21.2 C22.2 U41.1 U41.5 U41.9 U41.11 U41.13 U41.15 U42.1 U42.5 U42.9 U42.11 U42.13 U42.15 U43.6 U43.GND1 U43.GND3 U44.P$15
GND11: C23.2 C24.2 U45.1 U45.5 U45.9 U45.11 U45.13 U45.15 U46.1 U46.5 U46.9 U46.11 U46.13 U46.15 U47.6 U47.GND1 U47.GND3 U48.P$15
GND12: C25.2 C26.2 U49.1 U49.5 U49.9 U49.11 U49.13 U49.15 U50.1 U50.5 U50.9 U50.11 U50.13 U50.15 U51.6 U51.GND1 U51.GND3 U52.P$15
GND13: C27.2 C28.2 U53.1 U53.5 U53.9 U53.11 U53.13 U53.15 U54.1 U54.5 U54.9 U54.11 U54.13 U54.15 U55.6 U55.GND1 U55.GND3 U56.P$15
GND14: C29.2 C30.2 U57.1 U57.5 U57.9 U57.11 U57.13 U57.15 U58.1 U58.5 U58.9 U58.11 U58.13 U58.15 U59.6 U59.GND1 U59.GND3 U60.P$15
GND15: C31.2 C32.2 U61.1 U61.5 U61.9 U61.11 U61.13 U61.15 U62.1 U62.5 U62.9 U62.11 U62.13 U62.15 U63.6 U63.GND1 U63.GND3 U64.P$15
GND16: C33.2 C34.2 U65.1 U65.5 U65.9 U65.11 U65.13 U65.15 U66.1 U66.5 U66.9 U66.11 U66.13 U66.15 U67.6 U67.GND1 U67.GND3 U68.P$15
GND17: C35.2 C36.2 U69.1 U69.5 U69.9 U69.11 U69.13 U69.15 U70.1 U70.5 U70.9 U70.11 U70.13 U70.15 U71.6 U71.GND1 U71.GND3 U72.P$15
GND18: C37.2 C38.2 U73.1 U73.5 U73.9 U73.11 U73.13 U73.15 U74.1 U74.5 U74.9 U74.11 U74.13 U74.15 U75.6 U75.GND1 U75.GND3 U76.P$15
GND19: C39.2 C40.2 U77.1 U77.5 U77.9 U77.11 U77.13 U77.15 U78.1 U78.5 U78.9 U78.11 U78.13 U78.15 U79.6 U79.GND1 U79.GND3 U80.P$15
GND20: C41.2 C42.2 U81.1 U81.5 U81.9 U81.11 U81.13 U81.15 U82.1 U82.5 U82.9 U82.11 U82.13 U82.15 U83.6 U83.GND1 U83.GND3 U84.P$15
GND21: C43.2 C44.2 U85.1 U85.5 U85.9 U85.11 U85.13 U85.15 U86.1 U86.5 U86.9 U86.11 U86.13 U86.15 U87.6 U87.GND1 U87.GND3 U88.P$15
GND22: C45.2 C46.2 U89.1 U89.5 U89.9 U89.11 U89.13 U89.15 U90.1 U90.5 U90.9 U90.11 U90.13 U90.15 U91.6 U91.GND1 U91.GND3 U92.P$15
GND23: C47.2 C48.2 U93.1 U93.5 U93.9 U93.11 U93.13 U93.15 U94.1 U94.5 U94.9 U94.11 U94.13 U94.15 U95.6 U95.GND1 U95.GND3 U96.P$15
GND24: C49.2 C50.2 U97.1 U97.5 U97.9 U97.11 U97.13 U97.15 U98.1 U98.5 U98.9 U98.11 U98.13 U98.15 U99.6 U99.GND1 U99.GND3 U100.P$15
GND25: C51.2 C52.2 U101.1 U101.5 U101.9 U101.11 U101.13 U101.15 U102.1 U102.5 U102.9 U102.11 U102.13 U102.15 U103.6 U103.GND1 U103.GND3 U104.P$15
GND26: C53.2 C54.2 U105.1 U105.5 U105.9 U105.11 U105.13 U105.15 U106.1 U106.5 U106.9 U106.11 U106.13 U106.15 U107.6 U107.GND1 U107.GND3 U108.P$15
GND27: C55.2 C56.2 U109.1 U109.5 U109.9 U109.11 U109.13 U109.15 U110.1 U110.5 U110.9 U110.11 U110.13 U110.15 U111.6 U111.GND1 U111.GND3 U112.P$15
GND28: C57.2 C58.2 U113.1 U113.5 U113.9 U113.11 U113.13 U113.15 U114.1 U114.5 U114.9 U114.11 U114.13 U114.15 U115.6 U115.GND1 U115.GND3 U116.P$15
GND29: C59.2 C60.2 U117.1 U117.5 U117.9 U117.11 U117.13 U117.15 U118.1 U118.5 U118.9 U118.11 U118.13 U118.15 U119.6 U119.GND1 U119.GND3 U120.P$15
GND30: C61.2 C62.2 U121.1 U121.5 U121.9 U121.11 U121.13 U121.15 U122.1 U122.5 U122.9 U122.11 U122.13 U122.15 U123.6 U123.GND1 U123.GND3 U124.P$15
GND31: C63.2 C64.2 U125.1 U125.5 U125.9 U125.11 U125.13 U125.15 U126.1 U126.5 U126.9 U126.11 U126.13 U126.15 U127.6 U127.GND1 U127.GND3 U128.P$15
GP1: U5.48 U6.48
GP2: U5.42 U6.42
GP3: U5.34 U6.34
GP4: U5.32 U6.32
GP5: U5.30 U6.30
GP6: U5.28 U6.28
GP7: U5.26 U6.26
GP8: U5.25 U6.25
GP9: U5.24 U6.24
GP10: U9.48 U10.48
GP11: U9.42 U10.42
GP12: U9.34 U10.34
GP12_PWM0: U2.35 U3.35
GP12_PWM1: U5.35 U6.35
GP12_PWM2: U9.35 U10.35
GP12_PWM3: U13.35 U14.35
GP12_PWM4: U17.35 U18.35
GP12_PWM5: U21.35 U22.35
GP12_PWM6: U25.35 U26.35
GP12_PWM7: U29.35 U30.35
GP12_PWM8: U33.35 U34.35
GP12_PWM9: U37.35 U38.35
GP12_PWM10: U41.35 U42.35
GP12_PWM11: U45.35 U46.35
GP12_PWM12: U49.35 U50.35
GP12_PWM13: U53.35 U54.35
GP12_PWM14: U57.35 U58.35
GP12_PWM15: U61.35 U62.35
GP12_PWM16: U65.35 U66.35
GP12_PWM17: U69.35 U70.35
GP12_PWM18: U73.35 U74.35
GP12_PWM19: U77.35 U78.35
GP12_PWM20: U81.35 U82.35
GP12_PWM21: U85.35 U86.35
GP12_PWM22: U89.35 U90.35
GP12_PWM23: U93.35 U94.35
GP12_PWM24: U97.35 U98.35
GP12_PWM25: U101.35 U102.35
GP12_PWM26: U105.35 U106.35
GP12_PWM27: U109.35 U110.35
GP12_PWM28: U113.35 U114.35
GP12_PWM29: U117.35 U118.35
GP12_PWM30: U121.35 U122.35
GP12_PWM31: U125.35 U126.35
GP13: U9.32 U10.32
GP13_PWM1: U2.33 U3.33
GP13_PWM2: U5.33 U6.33
GP13_PWM3: U9.33 U10.33
GP13_PWM4: U13.33 U14.33
GP13_PWM5: U17.33 U18.33
GP13_PWM6: U21.33 U22.33
GP13_PWM7: U25.33 U26.33
GP13_PWM8: U29.33 U30.33
GP13_PWM9: U33.33 U34.33
GP13_PWM10: U37.33 U38.33
GP13_PWM11: U41.33 U42.33
GP13_PWM12: U45.33 U46.33
GP13_PWM13: U49.33 U50.33
GP13_PWM14: U53.33 U54.33
GP13_PWM15: U57.33 U58.33
GP13_PWM16: U61.33 U62.33
GP13_PWM17: U65.33 U66.33
GP13_PWM18: U69.33 U70.33
GP13_PWM19: U73.33 U74.33
GP13_PWM20: U77.33 U78.33
GP13_PWM21: U81.33 U82.33
GP13_PWM22: U85.33 U86.33
GP13_PWM23: U89.33 U90.33
GP13_PWM24: U93.33 U94.33
GP13_PWM25: U97.33 U98.33
GP13_PWM26: U101.33 U102.33
GP13_PWM27: U105.33 U106.33
GP13_PWM28: U109.33 U110.33
GP13_PWM29: U113.33 U114.33
GP13_PWM30: U117.33 U118.33
GP13_PWM31: U121.33 U122.33
GP13_PWM32: U125.33 U126.33
GP14: U2.48 U3.48
GP15: U2.42 U3.42
GP16: U9.30 U10.30
GP17: U9.28 U10.28
GP18: U9.26 U10.26
GP19: U9.25 U10.25
GP19_I2C_1_SCL: U2.41 U3.41
GP19_I2C_1_SCL1: U5.41 U6.41
GP19_I2C_1_SCL2: U9.41 U10.41
GP19_I2C_1_SCL3: U13.41 U14.41
GP19_I2C_1_SCL4: U17.41 U18.41
GP19_I2C_1_SCL5: U21.41 U22.41
GP19_I2C_1_SCL6: U25.41 U26.41
GP19_I2C_1_SCL7: U29.41 U30.41
GP19_I2C_1_SCL8: U33.41 U34.41
GP19_I2C_1_SCL9: U37.41 U38.41
GP19_I2C_1_SCL10: U41.41 U42.41
GP19_I2C_1_SCL11: U45.41 U46.41
GP19_I2C_1_SCL12: U49.41 U50.41
GP19_I2C_1_SCL13: U53.41 U54.41
GP19_I2C_1_SCL14: U57.41 U58.41
GP19_I2C_1_SCL15: U61.41 U62.41
GP19_I2C_1_SCL16: U65.41 U66.41
GP19_I2C_1_SCL17: U69.41 U70.41
GP19_I2C_1_SCL18: U73.41 U74.41
GP19_I2C_1_SCL19: U77.41 U78.41
GP19_I2C_1_SCL20: U81.41 U82.41
GP19_I2C_1_SCL21: U85.41 U86.41
GP19_I2C_1_SCL22: U89.41 U90.41
GP19_I2C_1_SCL23: U93.41 U94.41
GP19_I2C_1_SCL24: U97.41 U98.41
GP19_I2C_1_SCL25: U101.41 U102.41
GP19_I2C_1_SCL26: U105.41 U106.41
GP19_I2C_1_SCL27: U109.41 U110.41
GP19_I2C_1_SCL28: U113.41 U114.41
GP19_I2C_1_SCL29: U117.41 U118.41
GP19_I2C_1_SCL30: U121.41 U122.41
GP19_I2C_1_SCL31: U125.41 U126.41
GP20: U9.24 U10.24
GP20_I2C_1_SDA: U2.43 U3.43
GP20_I2C_1_SDA1: U5.43 U6.43
GP20_I2C_1_SDA2: U9.43 U10.43
GP20_I2C_1_SDA3: U13.43 U14.43
GP20_I2C_1_SDA4: U17.43 U18.43
GP20_I2C_1_SDA5: U21.43 U22.43
GP20_I2C_1_SDA6: U25.43 U26.43
GP20_I2C_1_SDA7: U29.43 U30.43
GP20_I2C_1_SDA8: U33.43 U34.43
GP20_I2C_1_SDA9: U37.43 U38.43
GP20_I2C_1_SDA10: U41.43 U42.43
GP20_I2C_1_SDA11: U45.43 U46.43
GP20_I2C_1_SDA12: U49.43 U50.43
GP20_I2C_1_SDA13: U53.43 U54.43
GP20_I2C_1_SDA14: U57.43 U58.43
GP20_I2C_1_SDA15: U61.43 U62.43
GP20_I2C_1_SDA16: U65.43 U66.43
GP20_I2C_1_SDA17: U69.43 U70.43
GP20_I2C_1_SDA18: U73.43 U74.43
GP20_I2C_1_SDA19: U77.43 U78.43
GP20_I2C_1_SDA20: U81.43 U82.43
GP20_I2C_1_SDA21: U85.43 U86.43
GP20_I2C_1_SDA22: U89.43 U90.43
GP20_I2C_1_SDA23: U93.43 U94.43
GP20_I2C_1_SDA24: U97.43 U98.43
GP20_I2C_1_SDA25: U101.43 U102.43
GP20_I2C_1_SDA26: U105.43 U106.43
GP20_I2C_1_SDA27: U109.43 U110.43
GP20_I2C_1_SDA28: U113.43 U114.43
GP20_I2C_1_SDA29: U117.43 U118.43
GP20_I2C_1_SDA30: U121.43 U122.43
GP20_I2C_1_SDA31: U125.43 U126.43
GP21: U13.48 U14.48
GP22: U13.42 U14.42
GP23: U13.34 U14.34
GP24: U13.32 U14.32
GP25: U13.30 U14.30
GP26: U13.28 U14.28
GP27: U13.26 U14.26
GP27_I2C_6_SCL: U2.45 U3.45
GP27_I2C_6_SCL1: U5.45 U6.45
GP27_I2C_6_SCL2: U9.45 U10.45
GP27_I2C_6_SCL3: U13.45 U14.45
GP27_I2C_6_SCL4: U17.45 U18.45
GP27_I2C_6_SCL5: U21.45 U22.45
GP27_I2C_6_SCL6: U25.45 U26.45
GP27_I2C_6_SCL7: U29.45 U30.45
GP27_I2C_6_SCL8: U33.45 U34.45
GP27_I2C_6_SCL9: U37.45 U38.45
GP27_I2C_6_SCL10: U41.45 U42.45
GP27_I2C_6_SCL11: U45.45 U46.45
GP27_I2C_6_SCL12: U49.45 U50.45
GP27_I2C_6_SCL13: U53.45 U54.45
GP27_I2C_6_SCL14: U57.45 U58.45
GP27_I2C_6_SCL15: U61.45 U62.45
GP27_I2C_6_SCL16: U65.45 U66.45
GP27_I2C_6_SCL17: U69.45 U70.45
GP27_I2C_6_SCL18: U73.45 U74.45
GP27_I2C_6_SCL19: U77.45 U78.45
GP27_I2C_6_SCL20: U81.45 U82.45
GP27_I2C_6_SCL21: U85.45 U86.45
GP27_I2C_6_SCL22: U89.45 U90.45
GP27_I2C_6_SCL23: U93.45 U94.45